# Altium PCB FDTI_USB_PCB.PcbDoc (part 1 of 2)
Units mil, origin at the board's own origin, x right, y up, seen from the top; angles counter-clockwise.
Board outline 5600 x 4000 mil, 4 copper layers (Top Layer, Plane(Gnd), Plane(PWR), Bottom Layer), stack 23.756 mil thick; 166 components, 158 nets, 411 pads, 530 vias.
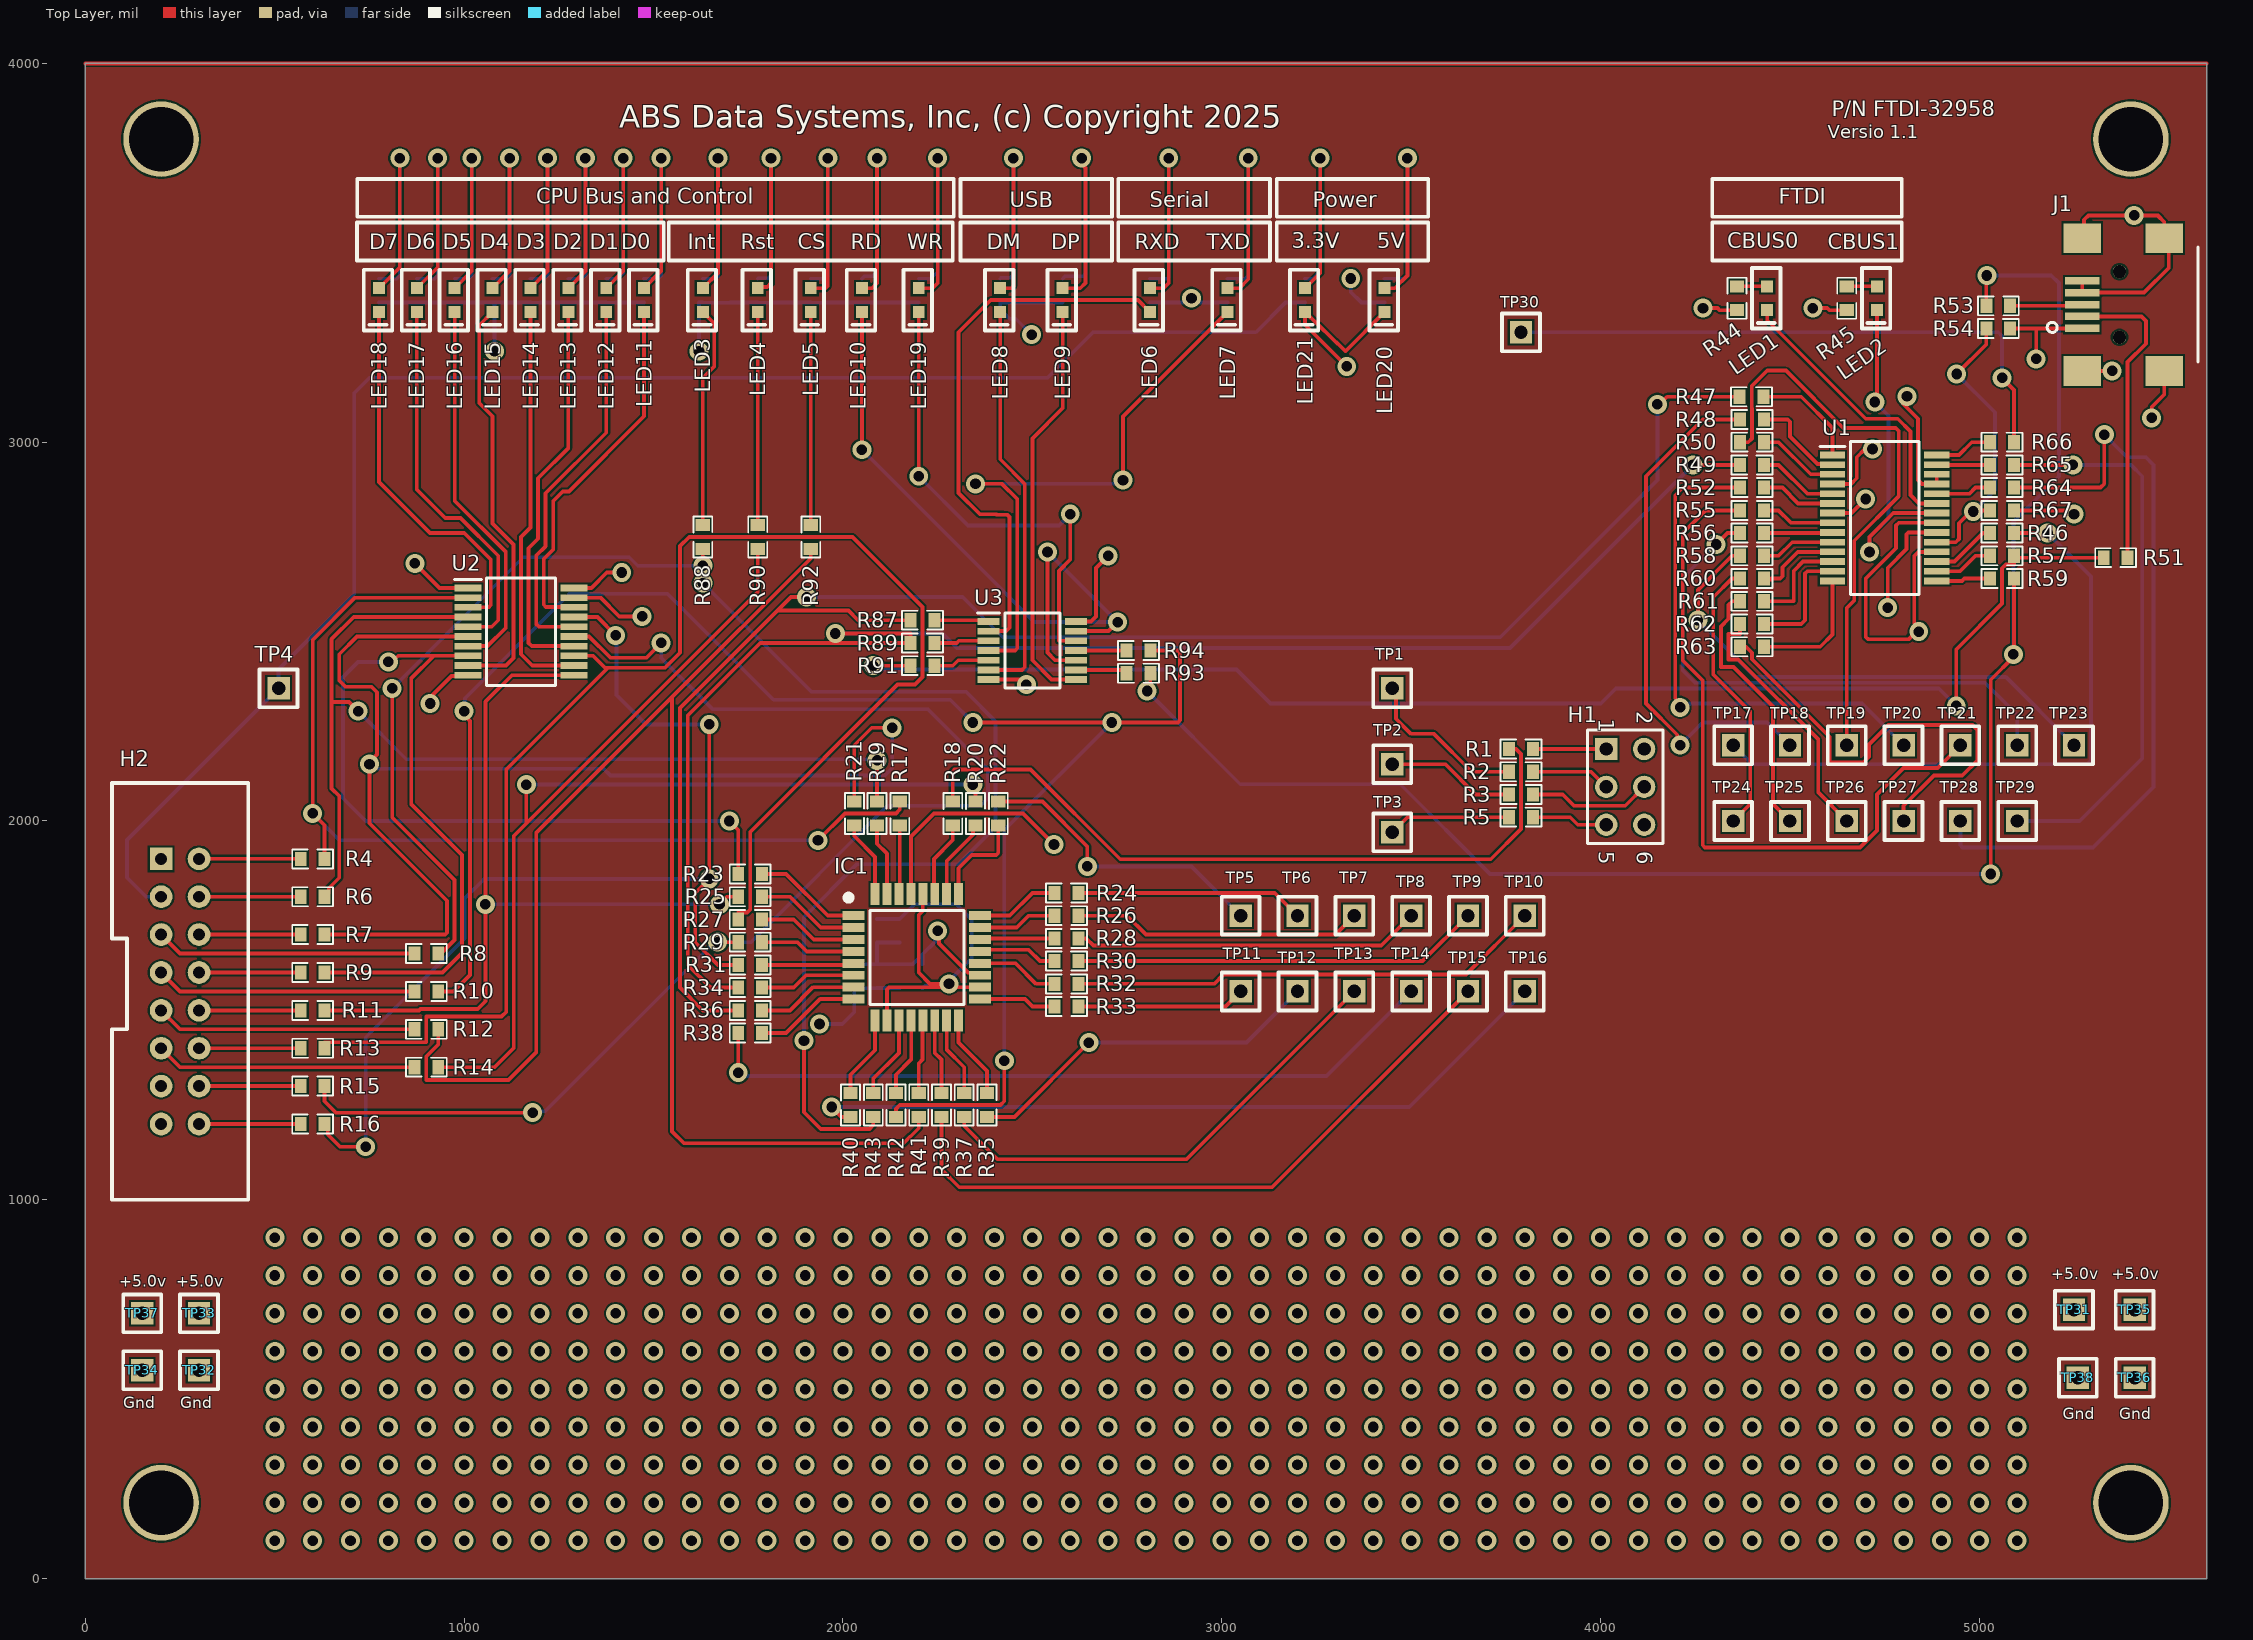
[diagram p0: Top Layer view]
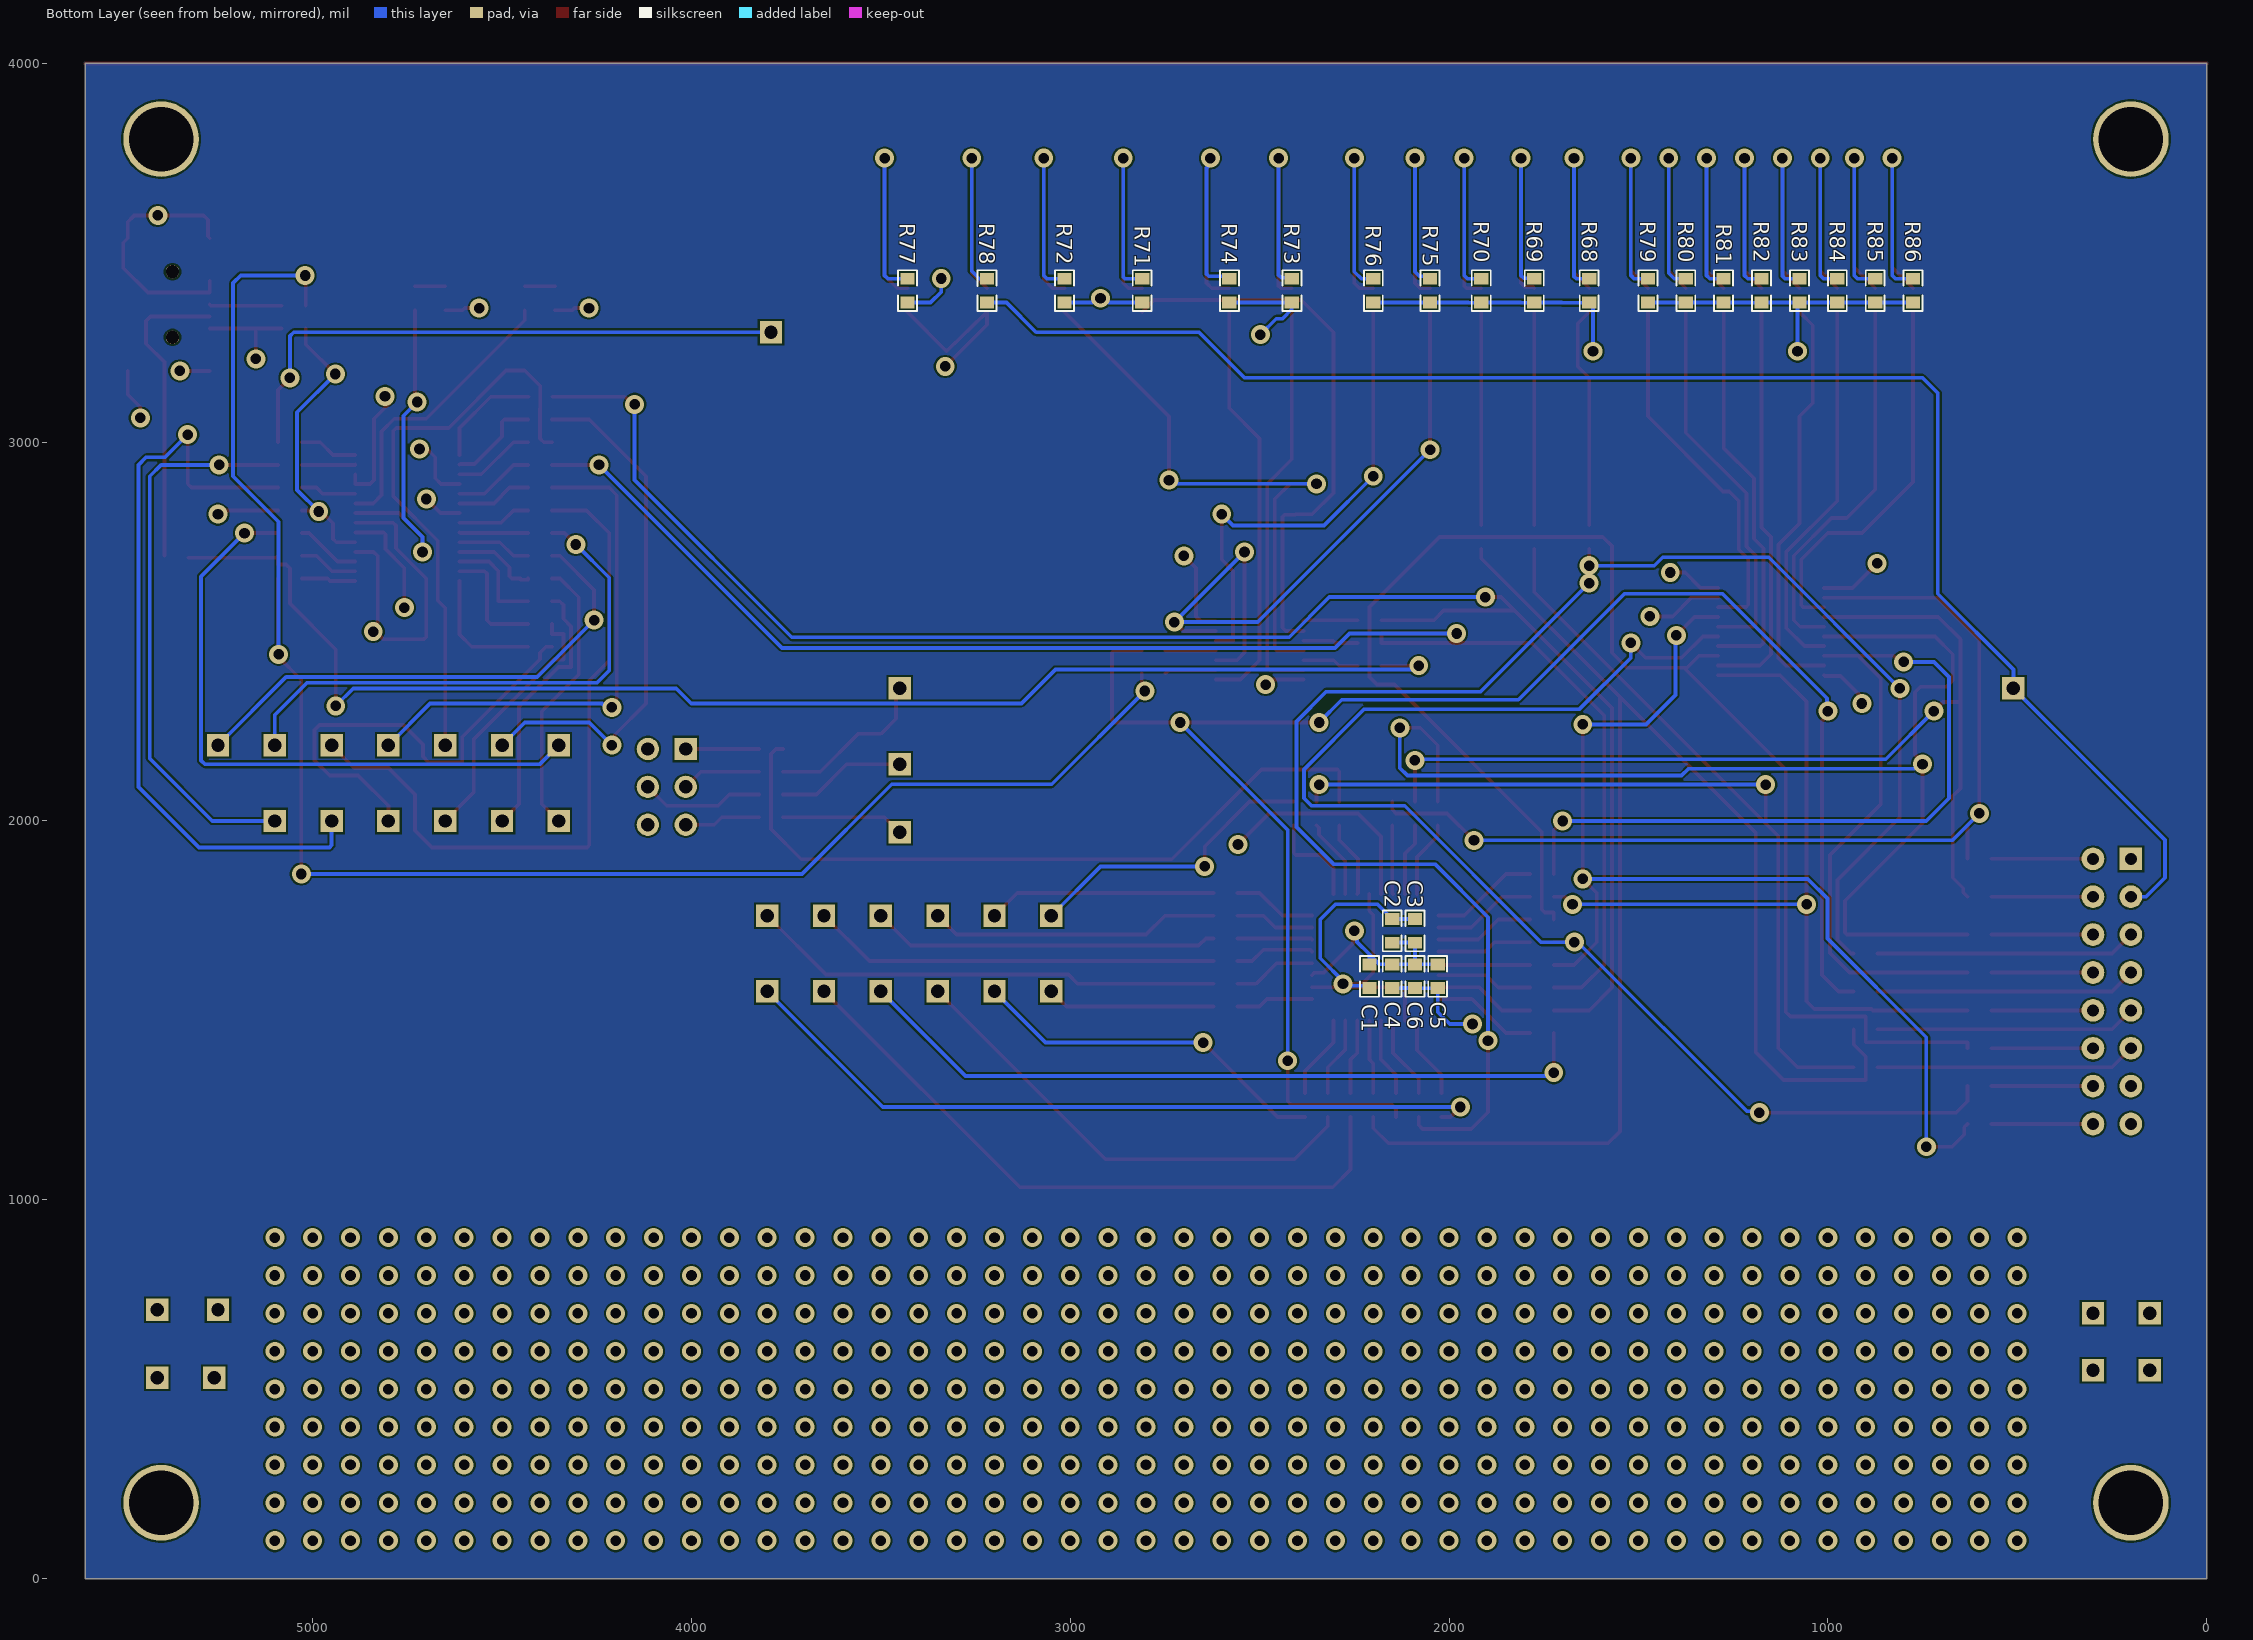
[diagram p1: Bottom Layer view, seen from below]
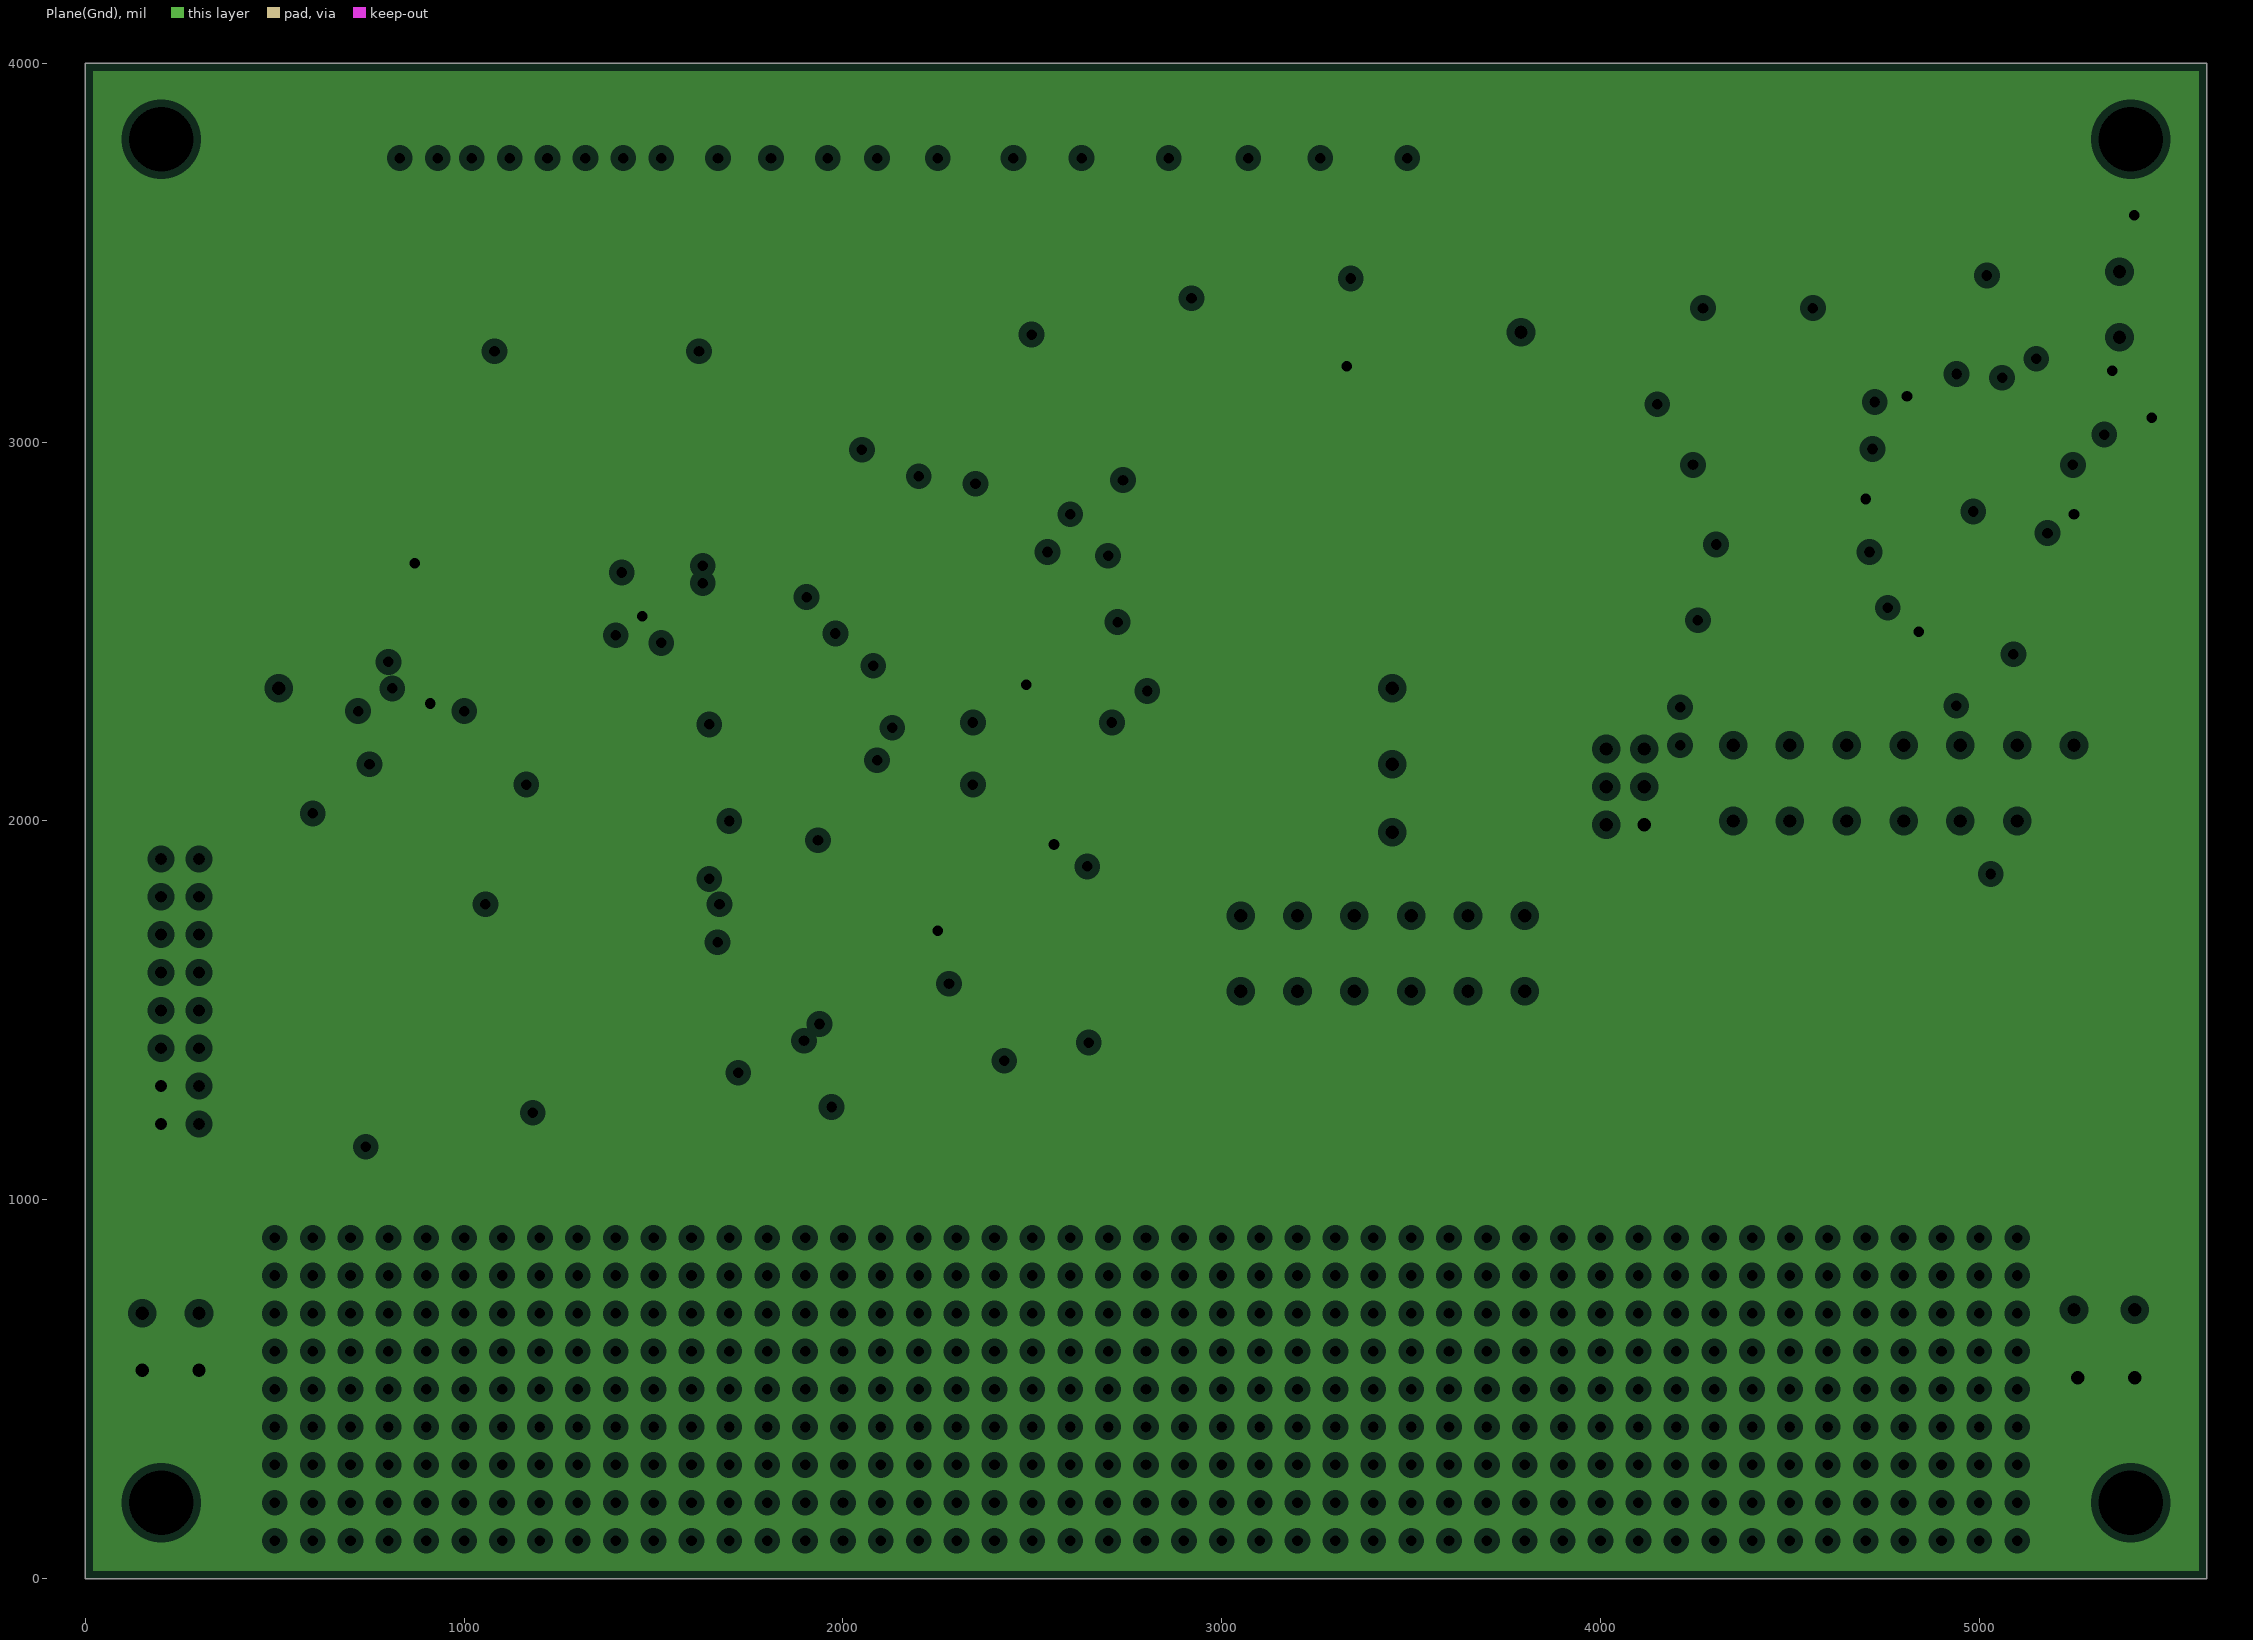
[diagram p2: Plane(Gnd), clearances drawn from the general rule]
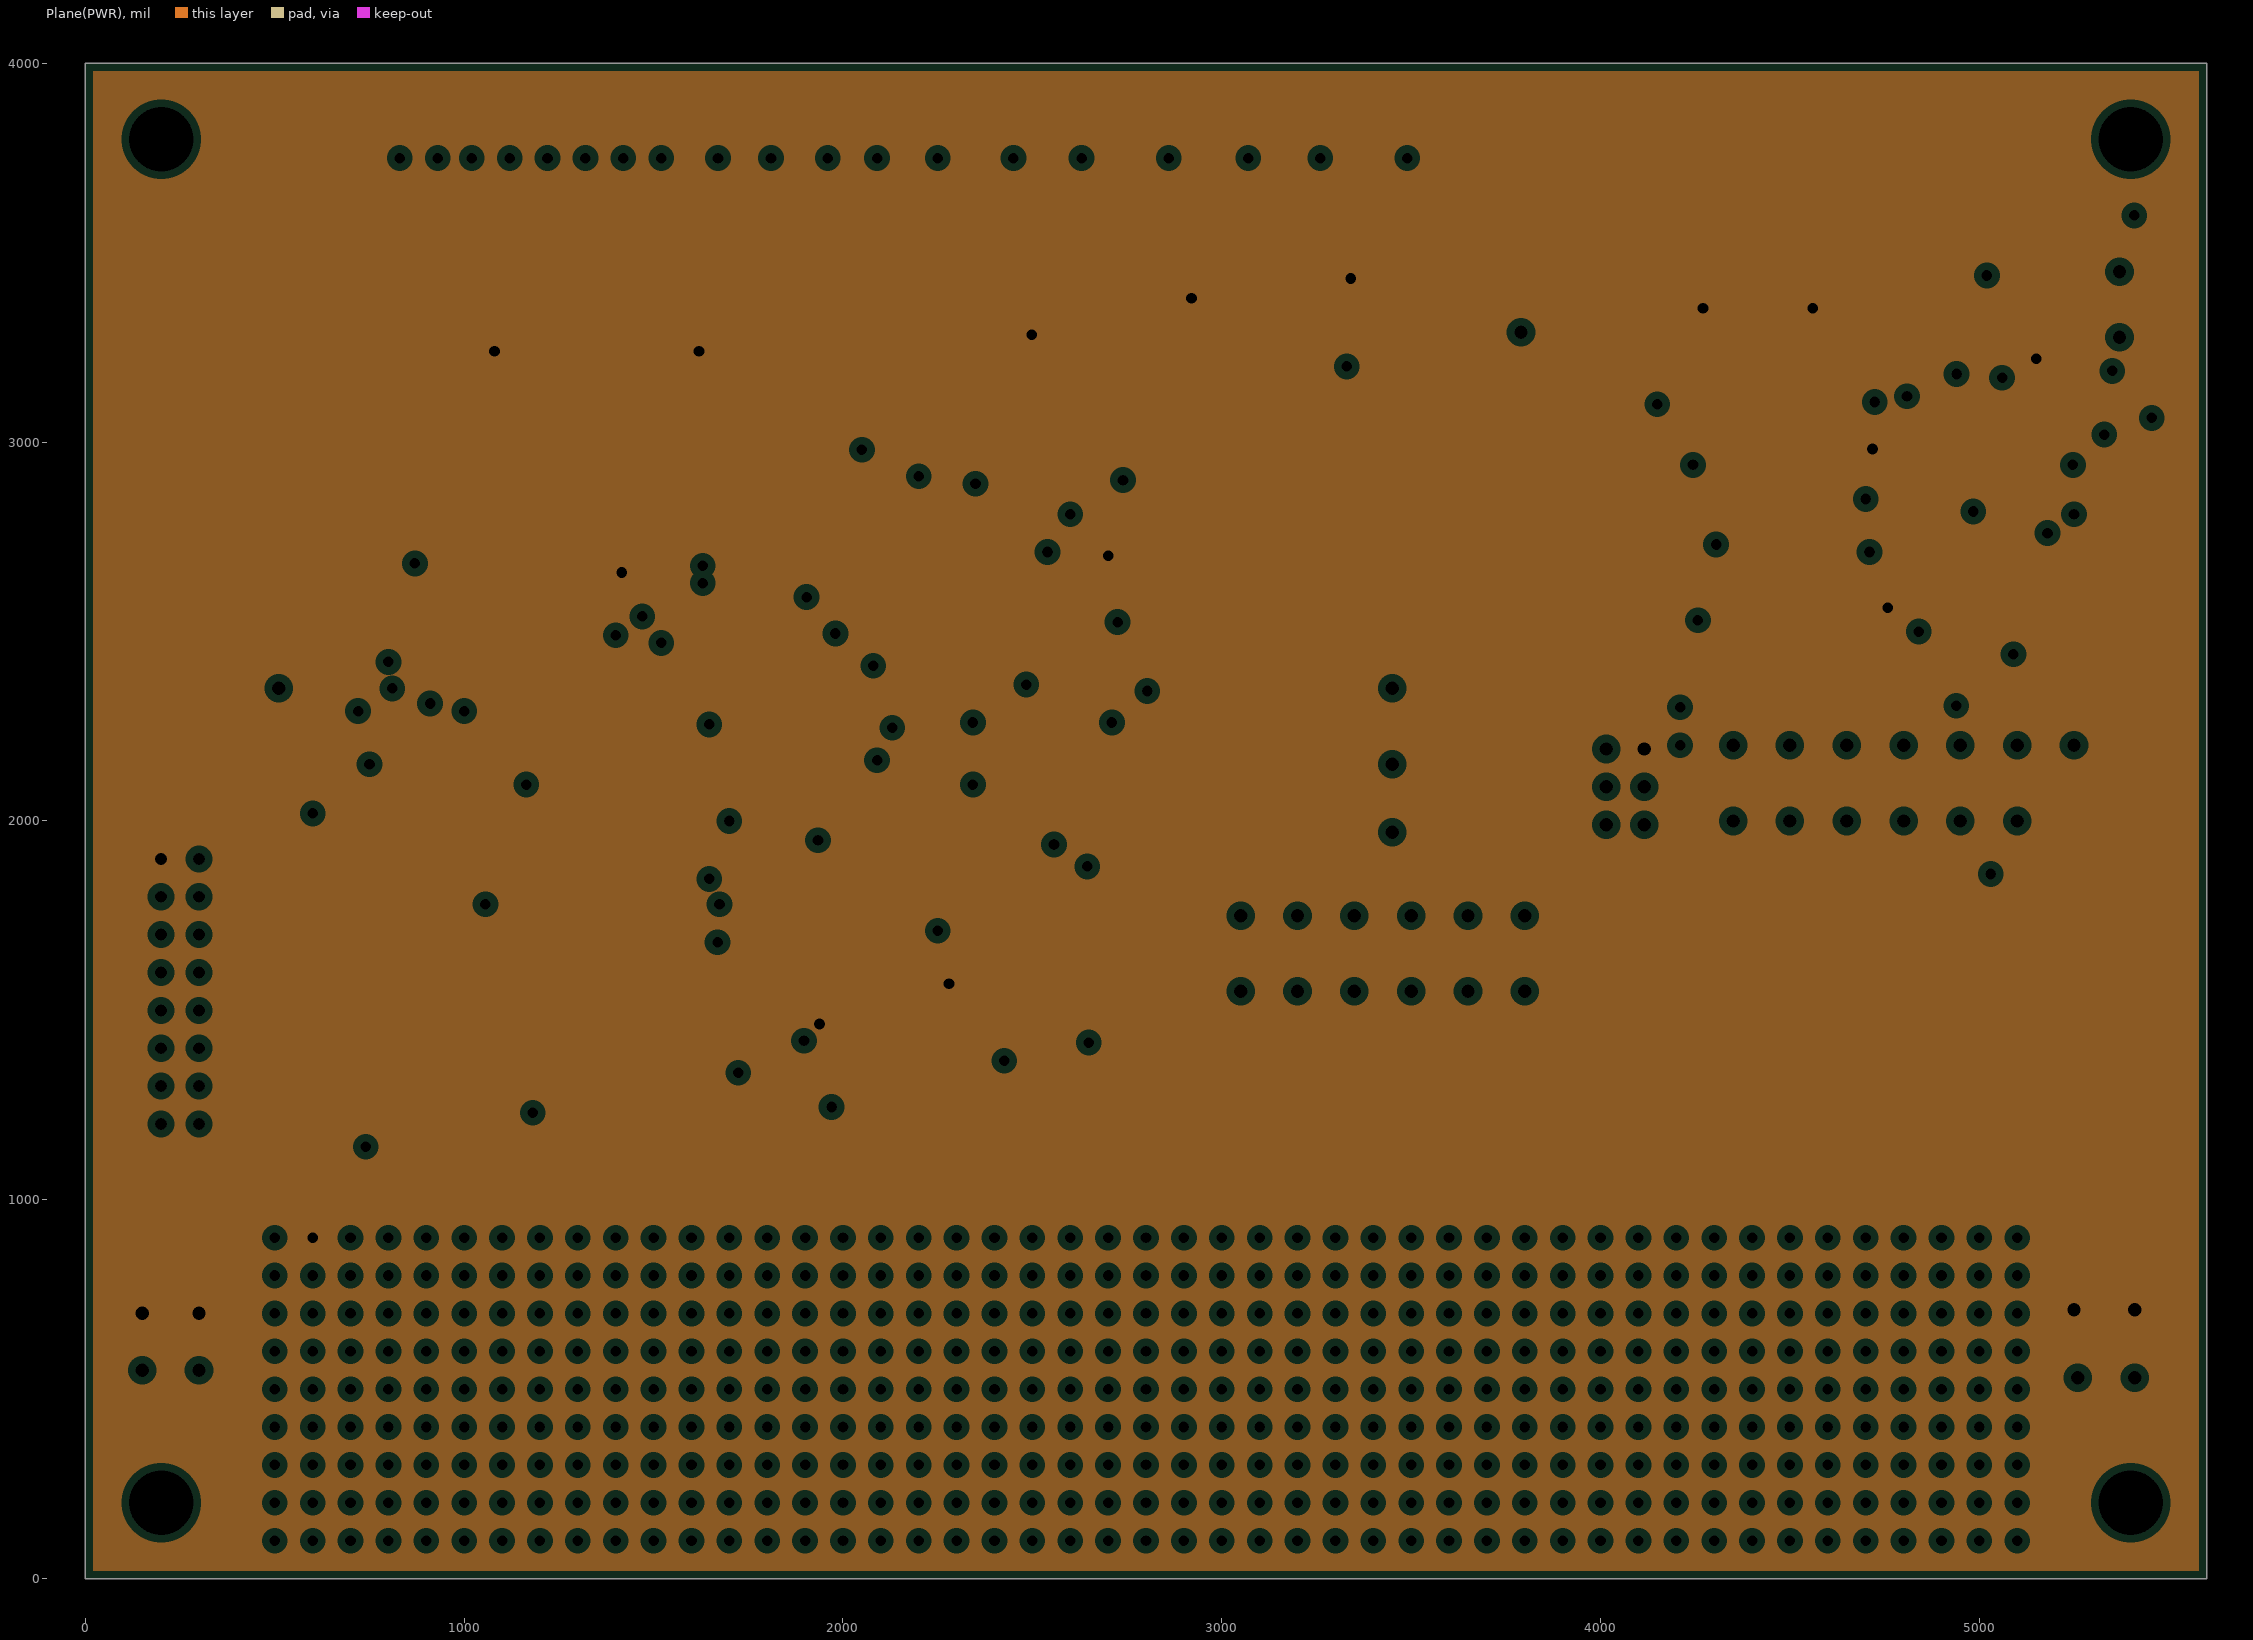
[diagram p3: Plane(PWR), clearances drawn from the general rule]
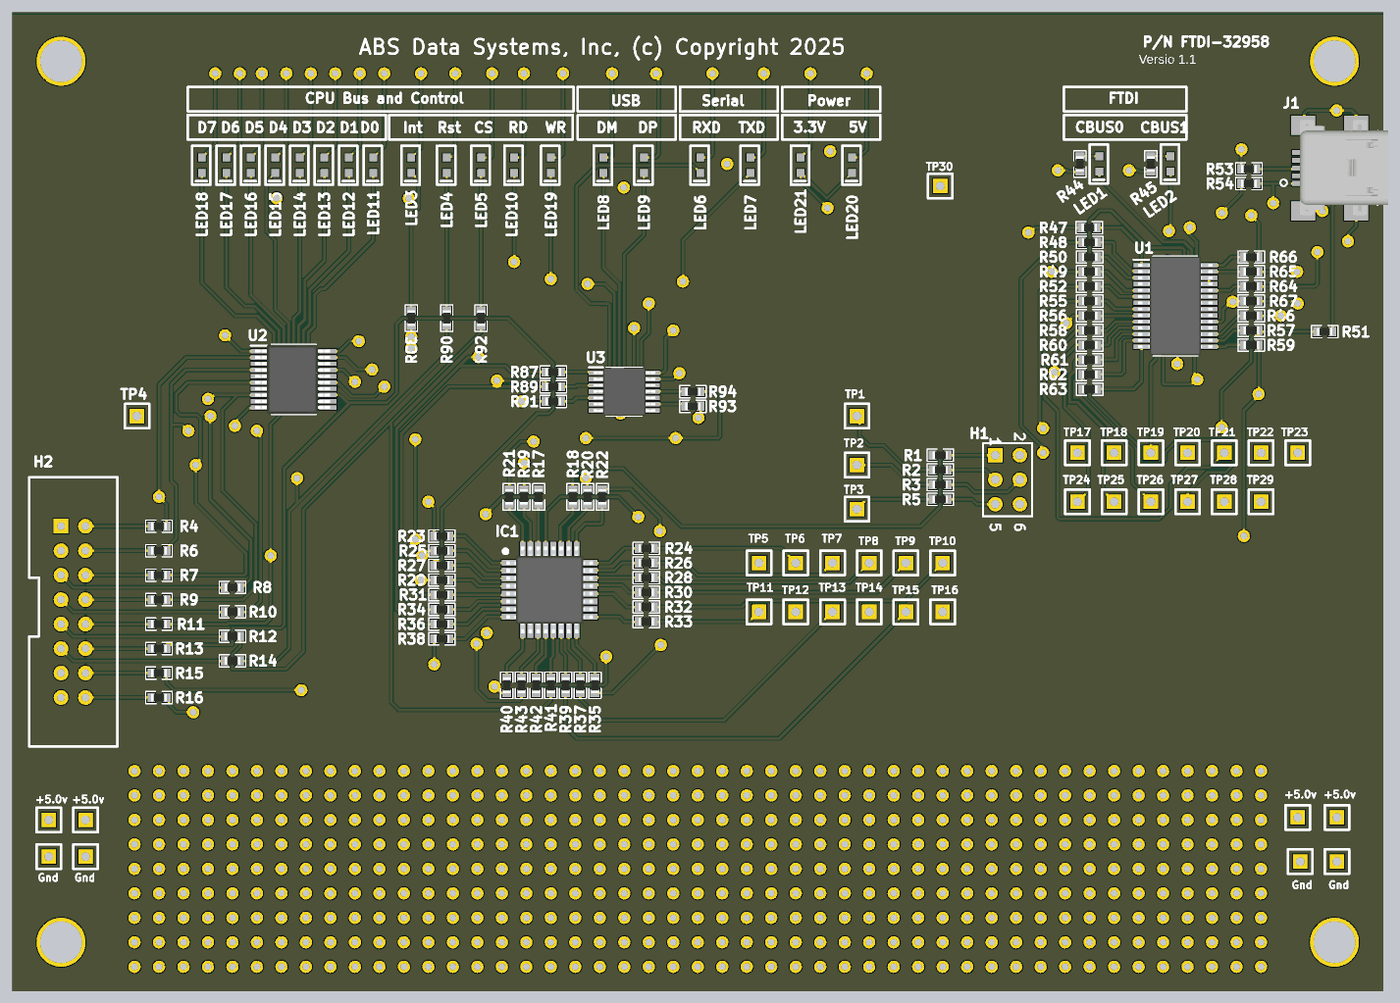
[diagram p5: 3D render of the assembled board from above, using the file's embedded part models]
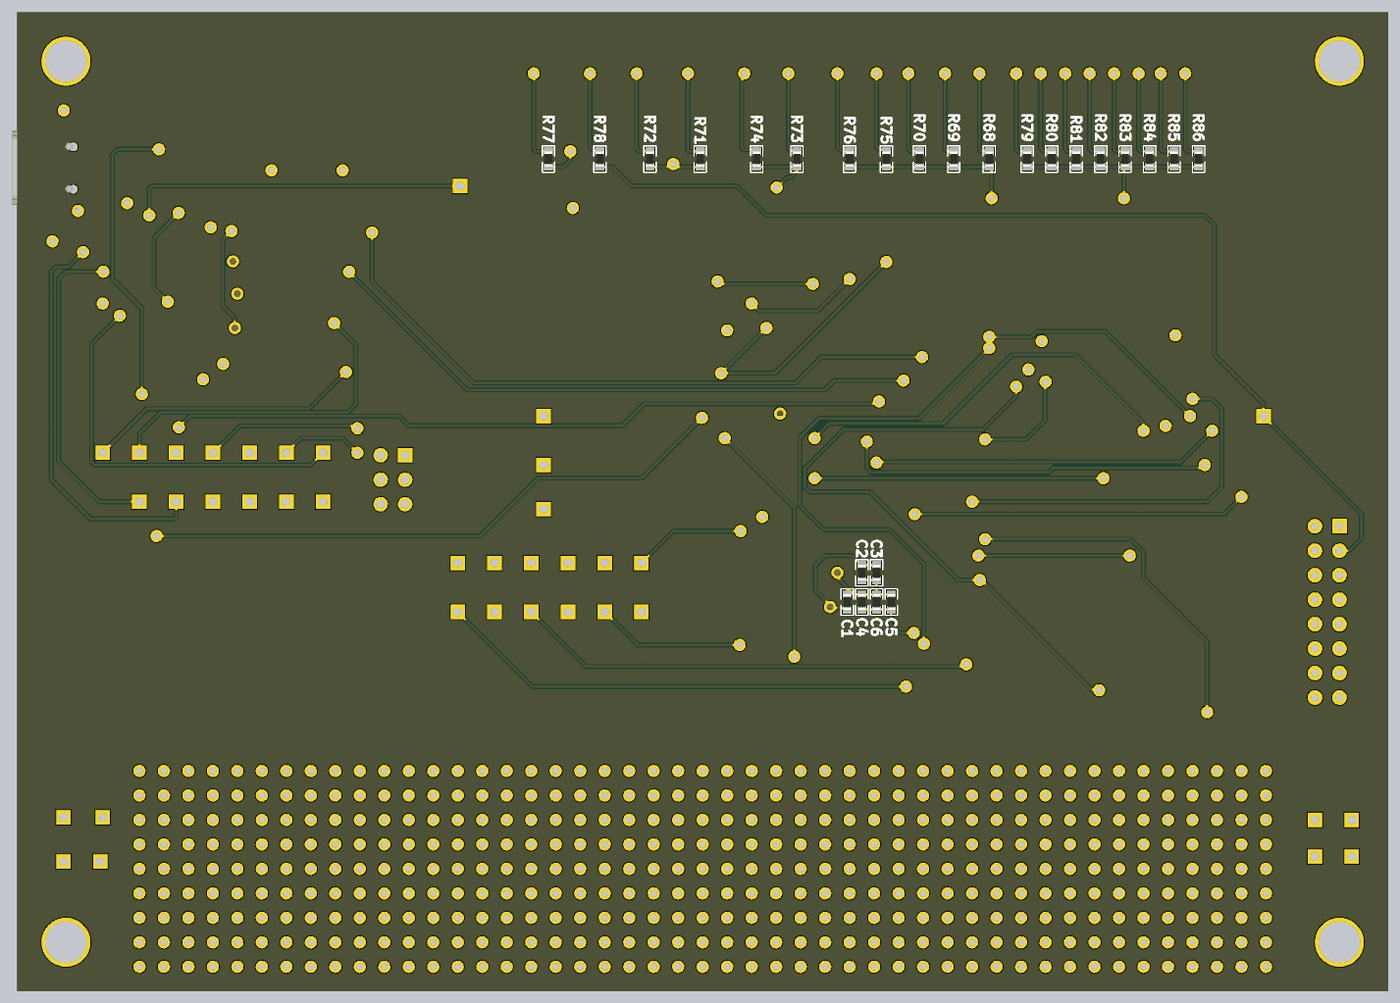
[diagram p6: 3D render of the assembled board from below, using the file's embedded part models]

## Layer stack, top to bottom
Top Solder: solder mask 0.4, Solder Resist, Dk 3.5
Top Layer: signal copper 1.4
Dielectric 2: prepreg 2.8, PP-006, Dk 4.1
Plane(Gnd): plane copper 1.378, net GND
Dielectric 1: dielectric 12.6, FR-4, Dk 4.8
Plane(PWR): plane copper 1.378, net +5
Dielectric 3: prepreg 2.8, PP-006, Dk 4.1
Bottom Layer: signal copper 1.4
Bottom Solder: solder mask 0.4, Solder Resist, Dk 3.5

## Board outline
0,0 0,4000 5600,4000 5600,0

## Design rules (kind name [scope] priority, off if disabled: settings)
Clearance [All] p1: gap=5 ignorepadtopadclearanceinfootprint=FALSE
HoleSize [All] p1: absolutevalues=TRUE maxlimit=200 minlimit=1 maxpercent=80.000 minpercent=20.000
HoleToHoleClearance [All] p1: gap=5 allowstackedmicrovias=TRUE
MinimumSolderMaskSliver [All] p1: minsoldermaskwidth=5
PlaneClearance [All] p1: clearance=20
PlaneConnect [All] p1: planeconnectstyle=Relief reliefexpansion=20 reliefentries=4 reliefconductorwidth=10 reliefairgap=10
PolygonConnect [All] p1: connectstyle=Relief reliefconductorwidth=10 reliefentries=4 polygonreliefangle="90 Angle" airgapwidth=10
RoutingVias [All] p1: holewidth=28 width=50 viastyle="Through Hole" minholewidth=28 minwidth=50 maxholewidth=28 maxwidth=50
SilkToSilkClearance [All] p1: silktosilkclearance=4
SilkToSolderMaskClearance [IsPad] p1: minsilkscreentomaskgap=3.5 clearancetoexposedcopper=TRUE
SolderMaskExpansion [All] p1: expansion=4 istentingtop=FALSE
Width [All] p1: maxlimit=10 minlimit=5 preferedwidth=10 minimp=50.000000 maximp=50.000000 favimp=50.000000
23 further rules are at their usual default settings.

## Classes and differential pairs
component class FDTI_USB_Card: C1 C2 C3 C4 C5 C6 H1 H2 IC1 J1 LED1 LED2 R1 R2 R3 R4 R5 R6 R7 R8 R9 R10 R11 R12 R13 R14 R15 R16 R17 R18 R19 R20 R21 R22 R23 R24 R25 R26 R27 R28 R29 R30 R31 R32 R33 R34 R35 R36 R37 R38 R39 R40 R41 R42 R43 R44 R45 R46 R47 R48 R49 R50 R51 R52 R53 R54 R55 R56 R57 R58 R59 R60 R61 R62 R63 R64 R65 R66 R67 TP1 TP2 TP3 TP4 TP5 TP6 TP7 TP8 TP9 TP10 TP11 TP12 TP13 TP14 TP15 TP16 TP17 TP18 TP19 TP20 TP21 TP22 TP23 TP24 TP25 TP26 TP27 TP28 TP29 TP30 TP31 TP32 TP33 TP34 TP35 TP36 TP37 TP38 U1
component class FDTI_LED_Monitor: LED3 LED4 LED5 LED6 LED7 LED8 LED9 LED10 LED11 LED12 LED13 LED14 LED15 LED16 LED17 LED18 LED19 LED20 LED21 R68 R69 R70 R71 R72 R73 R74 R75 R76 R77 R78 R79 R80 R81 R82 R83 R84 R85 R86 R87 R88 R89 R90 R91 R92 R93 R94 U2 U3

## Components (designator, comment, footprint, x,y, rotation, side; value= is the part's Value field where it differs from the comment)
C1 "100nf" 0603 2210,1590 r90 bottom locked
C2 "1uf" 0603 2150,1710 r270 bottom locked
C3 "100nf" 0603 2090,1710 r270 bottom locked
C4 "1uf" 0603 2150,1590 r90 bottom locked
C5 "100nf" 0603 2030,1590 r90 bottom locked
C6 "1uf" 0603 2090,1590 r90 bottom locked
H1 "UDPI Programmer" HDR2X3 4015,2190 r270 top locked
H2 "Header_IDC_2x8" HEADER16 200,1900 r0 top locked
IC1 "AVR64DD32-I_PT" QFP80P900X900X120-32N 2195,1640 r0 top locked
J1 "USB Micro Connector" 1734035-2USB 5370,3450 r180 top locked
LED1 "green" 0603_Diode 4440,3380 r90 top
LED2 "red" 0603_Diode 4730,3380 r90 top
LED3 "amber" 0603_Diode 1630,3375 r90 top
LED4 "blue" 0603_Diode 1775,3375 r90 top
LED5 "green" 0603_Diode 1915,3375 r90 top
LED6 "green" 0603_Diode 2810,3375 r90 top
LED7 "green" 0603_Diode 3015,3375 r90 top
LED8 "green" 0603_Diode 2415,3375 r90 top
LED9 "green" 0603_Diode 2580,3375 r90 top
LED10 "green" 0603_Diode 2050,3375 r90 top
LED11 "green" 0603_Diode 1475,3375 r90 top locked
LED12 "green" 0603_Diode 1375,3375 r90 top locked
LED13 "green" 0603_Diode 1275,3375 r90 top locked
LED14 "green" 0603_Diode 1175,3375 r90 top locked
LED15 "green" 0603_Diode 1075,3375 r90 top locked
LED16 "green" 0603_Diode 975,3375 r90 top locked
LED17 "green" 0603_Diode 875,3375 r90 top locked
LED18 "green" 0603_Diode 775,3375 r90 top locked
LED19 "red" 0603_Diode 2200,3375 r90 top
LED20 "red" 0603_Diode 3430,3375 r90 top
LED21 "amber" 0603_Diode 3220,3375 r90 top
R1 "0R" 0603 3790,2190 r0 top locked
R2 "0R" 0603 3790,2130 r0 top locked
R3 "0R" 0603 3790,2070 r180 top locked
R4 "0R" 0603 600,1900 r180 top locked
R5 "0R" 0603 3790,2010 r0 top locked
R6 "0R" 0603 600,1800 r180 top locked
R7 "0R" 0603 600,1700 r180 top locked
R8 "0R" 0603 900,1650 r0 top locked
R9 "0R" 0603 600,1600 r180 top locked
R10 "0R" 0603 900,1550 r0 top locked
R11 "0R" 0603 600,1500 r180 top locked
R12 "0R" 0603 900,1450 r0 top locked
R13 "0R" 0603 600,1400 r180 top locked
R14 "0R" 0603 900,1350 r0 top locked
R15 "0R" 0603 600,1300 r180 top locked
R16 "0R" 0603 600,1200 r180 top locked
R17 "0R" 0603 2150,2020 r270 top locked
R18 "0R" 0603 2290,2020 r90 top locked
R19 "0R" 0603 2090,2020 r270 top locked
R20 "0R" 0603 2350,2020 r90 top locked
R21 "0R" 0603 2030,2020 r270 top locked
R22 "0R" 0603 2410,2020 r90 top locked
R23 "0R" 0603 1755,1860 r0 top locked
R24 "0R" 0603 2590,1810 r0 top locked
R25 "0R" 0603 1755,1800 r0 top locked
R26 "0R" 0603 2590,1750 r0 top locked
R27 "0R" 0603 1755,1740 r0 top locked
R28 "0R" 0603 2590,1690 r0 top locked
R29 "0R" 0603 1755,1680 r0 top locked
R30 "0R" 0603 2590,1630 r0 top locked
R31 "0R" 0603 1755,1620 r0 top locked
R32 "0R" 0603 2590,1570 r0 top locked
R33 "0R" 0603 2590,1510 r0 top locked
R34 "0R" 0603 1755,1560 r0 top locked
R35 "0R" 0603 2380,1250 r270 top locked
R36 "0R" 0603 1755,1500 r0 top locked
R37 "0R" 0603 2320,1250 r270 top locked
R38 "0R" 0603 1755,1440 r0 top locked
R39 "0R" 0603 2260,1250 r270 top locked
R40 "0R" 0603 2020,1250 r90 top locked
R41 "0R" 0603 2200,1250 r270 top locked
R42 "0R" 0603 2140,1250 r270 top locked
R43 "0R" 0603 2080,1250 r270 top locked
R44 "270" 0603 4360,3380 r270 top
R45 "270" 0603 4650,3380 r270 top
R46 "0R" 0603 5060,2760 r0 top
R47 "0R" 0603 4398.5,3120 r0 top locked
R48 "0R" 0603 4400,3060 r180 top locked
R49 "0R" 0603 4400,2940 r0 top locked
R50 "0R" 0603 4400,3000 r180 top locked
R51 "0R" 0603 5360,2695 r180 top
R52 "0R" 0603 4400,2880 r180 top locked
R53 "0R" 0603 5050,3360 r180 top locked
R54 "4.7k" 0603 5050,3300 r0 top locked
R55 "0R" 0603 4400,2820 r180 top locked
R56 "0R" 0603 4400,2760 r180 top locked
R57 "0R" 0603 5060,2700 r180 top
R58 "0R" 0603 4400,2700 r180 top locked
R59 "0R" 0603 5060,2640 r180 top
R60 "0R" 0603 4400,2640 r180 top locked
R61 "0R" 0603 4400,2580 r180 top locked
R62 "0R" 0603 4400,2520 r180 top locked
R63 "0R" 0603 4400,2460 r180 top locked
R64 "0R" 0603 5060,2880 r0 top
R65 "0R" 0603 5060,2940 r0 top
R66 "0R" 0603 5060,3000 r0 top
R67 "10k" 0603 5060,2820 r180 top
R68 "180" 0603 1630,3400 r270 bottom
R69 "100" 0603 1775,3400 r90 bottom
R70 "180" 0603 1915,3400 r270 bottom
R71 "180" 0603 2810,3400 r270 bottom
R72 "180" 0603 3015,3400 r270 bottom
R73 "180" 0603 2415,3400 r270 bottom
R74 "180" 0603 2580,3400 r270 bottom
R75 "180" 0603 2050,3400 r270 bottom
R76 "180" 0603 2200,3400 r270 bottom
R77 "180" 0603 3430,3400 r270 bottom
R78 "47" 0603 3220,3400 r90 bottom
R79 "180" 0603 1475,3400 r270 bottom locked
R80 "180" 0603 1375,3400 r270 bottom locked
R81 "180" 0603 1275,3400 r270 bottom locked
R82 "180" 0603 1175,3400 r270 bottom locked
R83 "180" 0603 1075,3400 r270 bottom locked
R84 "180" 0603 975,3400 r270 bottom locked
R85 "180" 0603 875,3400 r270 bottom locked
R86 "180" 0603 775,3400 r270 bottom locked
R87 "0R" 0603 2210,2530 r0 top locked
R88 "0R" 0603 1630,2750 r90 top
R89 "0R" 0603 2210,2470 r0 top locked
R90 "0R" 0603 1775,2750 r90 top
R91 "0R" 0603 2210,2410 r0 top locked
R92 "0R" 0603 1915,2750 r90 top locked
R93 "0R" 0603 2780,2390 r180 top locked
R94 "0R" 0603 2780,2450 r180 top locked
TP1 "TP" TP 3450,2350 r0 top locked
TP2 "TP" TP 3450,2150 r0 top locked
TP3 "TP" TP 3450,1970 r0 top locked
TP4 "TP" TP 510,2350 r0 top
TP5 "TP" TP 3050,1750 r0 top locked
TP6 "TP" TP 3200,1750 r0 top locked
TP7 "TP" TP 3350,1750 r0 top locked
TP8 "TP" TP 3500,1750 r0 top locked
TP9 "TP" TP 3650,1750 r0 top locked
TP10 "TP" TP 3800,1750 r0 top locked
TP11 "TP" TP 3050,1550 r0 top locked
TP12 "TP" TP 3200,1550 r0 top locked
TP13 "TP" TP 3350,1550 r0 top locked
TP14 "TP" TP 3500,1550 r0 top locked
TP15 "TP" TP 3650,1550 r0 top locked
TP16 "TP" TP 3800,1550 r0 top locked
TP17 "TP" TP 4350,2200 r0 top locked
TP18 "TP" TP 4500,2200 r0 top locked
TP19 "TP" TP 4650,2200 r0 top locked
TP20 "TP" TP 4800,2200 r0 top locked
TP21 "TP" TP 4950,2200 r0 top locked
TP22 "TP" TP 5100,2200 r0 top locked
TP23 "TP" TP 5250,2200 r0 top locked
TP24 "TP" TP 4350,2000 r0 top locked
TP25 "TP" TP 4500,2000 r0 top locked
TP26 "TP" TP 4650,2000 r0 top locked
TP27 "TP" TP 4800,2000 r0 top locked
TP28 "TP" TP 4950,2000 r0 top locked
TP29 "TP" TP 5100,2000 r0 top locked
TP30 "TP" TP 3790,3290 r0 top
TP31 "TP" TP 5250,710 r0 top
TP32 "TP" TP 300,550 r0 top
TP33 "TP" TP 300,700 r0 top
TP34 "TP" TP 150,550 r0 top
TP35 "TP" TP 5410,710 r0 top
TP36 "TP" TP 5410,530 r0 top
TP37 "TP" TP 150,700 r0 top
TP38 "TP" TP 5260,530 r0 top
U1 "FT232RL-REEL" SOIC-28_Narrow 4750,2800 r0 top locked
U2 "SN74ABT240ADBR" SOP65P780X200-20N 1150,2500 r0 top locked
U3 "SN74AC04PWR" SOP65P640X120-14N 2500,2450 r0 top locked

## Footprints (in the part's own frame and the unit in brackets; to place one, negate y for a bottom-side part, rotate by r counter-clockwise, add the part's x,y. Pads: shape width x height; smd on the part's side, far side on the other; paste and mask are expansions set on the pad)
0603 [mm]
  rect 0.8x0.95 smd: 1(-0.8,0) 2(0.8,0)
  silkscreen extent -1.37,-0.64 1.37,0.64, body extent -0.8,-0.4 0.8,0.4, height 0.55
0603_Diode [mm]
  rect 0.8x0.8 smd: 1(-0.8,0) 2(0.8,0)
  silkscreen extent -2.03,-0.89 2.03,1.02
1734035-2USB [mm]
  rect 2.3x0.5 smd: 1(2.5,3.8) 2(2.5,3) 3(2.5,2.2) 4(2.5,1.4) 5(2.5,0.6)
  rect 2.5x2 smd: 6(2.5,-2.25) 7(-3,-2.25) 8(-3,6.65) 9(2.5,6.65)
  round 0.9 hole 0.9 unplated: 10(0,4.4) 11(0,0)
  silkscreen extent -5.25,-1.65 4.85,6.05, body extent -6.35,-2.79 2.85,7.11, height 4.17
HDR2X3 [mm] "Connector; Header; 3x2 Position"
  rect 1.5x1.5 hole 0.9: 1(0,0)
  round 1.5 hole 0.9: 2(0,2.54) 3(2.54,0) 4(2.54,2.54) 5(5.08,0) 6(5.08,2.54)
  silkscreen extent -1.27,-1.27 6.35,3.81
HEADER16 [mil]
  rect 60x60 hole 31.5: 1(0,0)
  round 60 hole 31.5: 2(100,0) 3(0,-100) 4(100,-100) 5(0,-200) 6(100,-200) 7(0,-300) 8(100,-300) 9(0,-400) 10(100,-400) 11(0,-500) 12(100,-500) 13(0,-600) 14(100,-600) 15(0,-700) 16(100,-700)
  silkscreen extent -130,-900 230,200
QFP80P900X900X120-32N [mm]
  rect 1.475x0.6 smd: 1(-4.238,2.8) 2(-4.238,2) 3(-4.238,1.2) 4(-4.238,0.4) 5(-4.238,-0.4) 6(-4.238,-1.2) 7(-4.238,-2) 8(-4.238,-2.8) 17(4.238,-2.8) 18(4.238,-2) 19(4.238,-1.2) 20(4.238,-0.4) 21(4.238,0.4) 22(4.238,1.2) 23(4.238,2) 24(4.238,2.8)
  rect 0.6x1.475 smd: 9(-2.8,-4.238) 10(-2,-4.238) 11(-1.2,-4.238) 12(-0.4,-4.238) 13(0.4,-4.238) 14(1.2,-4.238) 15(2,-4.238) 16(2.8,-4.238) 25(2.8,4.238) 26(2,4.238) 27(1.2,4.238) 28(0.4,4.238) 29(-0.4,4.238) 30(-1.2,4.238) 31(-2,4.238) 32(-2.8,4.238)
  silkscreen extent -4.77,-3.15 3.15,4.2, body extent -4.5,-4.5 4.5,4.5, height 1.2
SOIC-28_Narrow [mm]
  rect 1.7x0.45 smd: 1(-3.5,4.225) 2(-3.5,3.575) 3(-3.5,2.925) 4(-3.5,2.275) 5(-3.5,1.625) 6(-3.5,0.975) 7(-3.5,0.325) 8(-3.5,-0.325) 9(-3.5,-0.975) 10(-3.5,-1.625) 11(-3.5,-2.275) 12(-3.5,-2.925) 13(-3.5,-3.575) 14(-3.5,-4.225) 15(3.5,-4.225) 16(3.5,-3.575) 17(3.5,-2.925) 18(3.5,-2.275) 19(3.5,-1.625) 20(3.5,-0.975) 21(3.5,-0.325) 22(3.5,0.325) 23(3.5,0.975) 24(3.5,1.625) 25(3.5,2.275) 26(3.5,2.925) 27(3.5,3.575) 28(3.5,4.225)
  silkscreen extent -4.35,-5.14 2.3,5.14, body extent -3.89,-5.14 3.89,5.14, height 2
SOP65P640X120-14N [mm]
  rect 1.475x0.45 smd: 1(-2.938,1.95) 2(-2.938,1.3) 3(-2.938,0.65) 4(-2.938,0) 5(-2.938,-0.65) 6(-2.938,-1.3) 7(-2.938,-1.95) 8(2.938,-1.95) 9(2.938,-1.3) 10(2.938,-0.65) 11(2.938,0) 12(2.938,0.65) 13(2.938,1.3) 14(2.938,1.95)
  silkscreen extent -3.67,-2.5 1.85,2.53, body extent -3.2,-2.5 3.2,2.5, height 1.13
SOP65P780X200-20N [mm]
  rect 1.8x0.45 smd: 1(-3.55,2.925) 2(-3.55,2.275) 3(-3.55,1.625) 4(-3.55,0.975) 5(-3.55,0.325) 6(-3.55,-0.325) 7(-3.55,-0.975) 8(-3.55,-1.625) 9(-3.55,-2.275) 10(-3.55,-2.925) 11(3.55,-2.925) 12(3.55,-2.275) 13(3.55,-1.625) 14(3.55,-0.975) 15(3.55,-0.325) 16(3.55,0.325) 17(3.55,0.975) 18(3.55,1.625) 19(3.55,2.275) 20(3.55,2.925)
  silkscreen extent -4.45,-3.6 2.3,3.6, body extent -4.03,-3.6 3.77,3.6, height 1.9
TP [mm] "Test Point"
  rect 1.5x1.5 hole 0.9: 1(0,0)
  silkscreen extent -1.27,-1.27 1.27,1.27

## Part data
C1 C3 C5: library part CL10B104JB8NNNC, "Samsung Electro-Mechanics 0603 100nf"
C2 C4 C6: library part CL10B105KA8NNNL, "Samsung Electro-Mechanics 0603 1uf"
H1: "6 Pin 2X3 Through Hole Header"
H2: "16 Pin 2x8 Through Hold IDC Connector", Color=Black, Manufacturer=Samtec, Manufacturer Part Number=TST-108-01-G-D, Max Operating Temperature=125°C, Min Operating Temperature=-55°C, Supplier Part Number 1=SAM10835-ND, Category="Headers and Wire Housings", ComponentLink1Description=https://datasheet.ciiva.com/739/tst-mkt-739845.pdf?src-supplier=Digi-Key, ComponentLink1URL=https://datasheet.ciiva.com/739/tst-mkt-739845.pdf?src-supplier=Digi-Key, ComponentLink2Description=https://datasheet.ciiva.com/10018/htst-10018510.pdf?src-supplier=Avnet, ComponentLink2URL=https://datasheet.ciiva.com/10018/htst-10018510.pdf?src-supplier=Avnet, Connector Type="Male Pin", Contact Material=Bronze, Contact Mating Length=0.25inch, Contact Plating=Gold, Depth=9.27mm, Gender=Male, Housing Color=Black, Housing Material=Polyester, Length=27.94mm, Mount="Through Hole", Number of Contacts=16, Number of Positions=16, Number of Rows=2, Orientation=Straight, Packaging=Rail/Tube, Pitch=2.54mm, Pricing 1="1=2.85000, 10=2.73600, 100=2.28000, 500=1.93800, 1000=1.65300, 5000=1.48200 (USD)", REACH SVHC="No SVHC", RoHS=Yes, Row Spacing=0.1inch, Stock 1=227, Supplier 1=Digi-Key, Termination=Solder
IC1: "Integrated Circuit", Manufacturer_Name=Microchip, Manufacturer_Part_Number="AVR64DD32-I/PT | MULTI-VOLTAGE I/O", Datasheet Link=https://www.microchip.com/en-us/product/AVR64DD32, Height=1.2mm
J1: library part 1734035-4, "USB Micro Connector SMD", Manufacturer_Name="TE Connectivity", Mouser2 Part Number=571-1734035-4, Datasheet Link=https://componentsearchengine.com//1734035-4.pdf, Manufacturer_Part_Number=1734035-4, Mouser2 Price/Stock=https://www.mouser.com/Search/Refine.aspx?Keyword=571-1734035-4
LED1 LED5 LED6 LED7 LED8 LED9 LED10 LED11 LED12 LED13 LED14 LED15 LED16 LED17 LED18: library part 150060GS75000, "Wurth Elektronik 0603 green", Case Code (Imperial)=0603, Case Code (Metric)=1608, Color=Green, Forward Current=30mA, Forward Voltage=3.2V, Manufacturer="Wurth Electronics", Max Operating Temperature=85°C, Min Operating Temperature=-40°C, Package Quantity=4000, Test Current=20mA, Case/Package=0603, Category=LEDs, ComponentLink1Description=https://datasheet.ciiva.com/29562/150060gs75000-29562868.pdf?src-supplier=Digi-Key, ComponentLink1URL=https://datasheet.ciiva.com/29562/150060gs75000-29562868.pdf?src-supplier=Digi-Key, ComponentLink2Description=https://datasheet.ciiva.com/29279/759427-da-01-en-chipled-0603-w-kl-gruen-150060gs75000-29279201.pdf?src-supplier=Conrad, ComponentLink2URL=https://datasheet.ciiva.com/29279/759427-da-01-en-chipled-0603-w-kl-gruen-150060gs75000-29279201.pdf?src-supplier=Conrad, ComponentLink3Description=https://datasheet.ciiva.com/29562/150060gs75000-29562869.pdf?src-supplier=Digi-Key, ComponentLink3URL=https://datasheet.ciiva.com/29562/150060gs75000-29562869.pdf?src-supplier=Digi-Key, ComponentLink4Description=https://datasheet.ciiva.com/29562/150060gs75000-29562870.pdf?src-supplier=Digi-Key, ComponentLink4URL=https://datasheet.ciiva.com/29562/150060gs75000-29562870.pdf?src-supplier=Digi-Key, Dominant Wavelength=520nm, Height=0.7mm, Lead Free="Lead Free", Length=1.6mm, Lens Style=Clear,Rectangular, Luminous Intensity=430mcd, Manufacturer Part Number=150060GS75000, Mount="Surface Mount", Packaging="Tape and Reel", Pricing 1="1=0.14000, 50=0.13300, 100=0.11400, 500=0.09900 (USD)", REACH SVHC=Unknown, RoHS=Yes, Stock 1=71509, Supplier 1=Digi-Key, Viewing Angle=140°, Wavelength=520nm, Width=0.8mm
LED2 LED19 LED20: library part 150060RS75000, "Wurth Elektronik 0603 red", Case Code (Imperial)=0603, Case Code (Metric)=1608, Color=Green, Forward Current=30mA, Forward Voltage=3.2V, Manufacturer="Wurth Electronics", Manufacturer Part Number=150060GS75000, Max Operating Temperature=85°C, Min Operating Temperature=-40°C, Package Quantity=4000, Test Current=20mA, Case/Package=0603, Category=LEDs, ComponentLink1Description=https://datasheet.ciiva.com/29562/150060gs75000-29562868.pdf?src-supplier=Digi-Key, ComponentLink1URL=https://datasheet.ciiva.com/29562/150060gs75000-29562868.pdf?src-supplier=Digi-Key, ComponentLink2Description=https://datasheet.ciiva.com/29279/759427-da-01-en-chipled-0603-w-kl-gruen-150060gs75000-29279201.pdf?src-supplier=Conrad, ComponentLink2URL=https://datasheet.ciiva.com/29279/759427-da-01-en-chipled-0603-w-kl-gruen-150060gs75000-29279201.pdf?src-supplier=Conrad, ComponentLink3Description=https://datasheet.ciiva.com/29562/150060gs75000-29562869.pdf?src-supplier=Digi-Key, ComponentLink3URL=https://datasheet.ciiva.com/29562/150060gs75000-29562869.pdf?src-supplier=Digi-Key, ComponentLink4Description=https://datasheet.ciiva.com/29562/150060gs75000-29562870.pdf?src-supplier=Digi-Key, ComponentLink4URL=https://datasheet.ciiva.com/29562/150060gs75000-29562870.pdf?src-supplier=Digi-Key, Dominant Wavelength=520nm, Height=0.7mm, Lead Free="Lead Free", Length=1.6mm, Lens Style=Clear,Rectangular, Luminous Intensity=430mcd, Mount="Surface Mount", Packaging="Tape and Reel", Pricing 1="1=0.14000, 50=0.13300, 100=0.11400, 500=0.09900 (USD)", REACH SVHC=Unknown, RoHS=Yes, Stock 1=71509, Supplier 1=Digi-Key, Viewing Angle=140°, Wavelength=520nm, Width=0.8mm
LED3 LED21: library part 150060AS75000, "Wurth Elektronik 0603 amber", Case Code (Imperial)=0603, Case Code (Metric)=1608, Color=Green, Forward Current=30mA, Forward Voltage=3.2V, Manufacturer="Wurth Electronics", Manufacturer Part Number=150060GS75000, Max Operating Temperature=85°C, Min Operating Temperature=-40°C, Package Quantity=4000, Test Current=20mA, Case/Package=0603, Category=LEDs, ComponentLink1Description=https://datasheet.ciiva.com/29562/150060gs75000-29562868.pdf?src-supplier=Digi-Key, ComponentLink1URL=https://datasheet.ciiva.com/29562/150060gs75000-29562868.pdf?src-supplier=Digi-Key, ComponentLink2Description=https://datasheet.ciiva.com/29279/759427-da-01-en-chipled-0603-w-kl-gruen-150060gs75000-29279201.pdf?src-supplier=Conrad, ComponentLink2URL=https://datasheet.ciiva.com/29279/759427-da-01-en-chipled-0603-w-kl-gruen-150060gs75000-29279201.pdf?src-supplier=Conrad, ComponentLink3Description=https://datasheet.ciiva.com/29562/150060gs75000-29562869.pdf?src-supplier=Digi-Key, ComponentLink3URL=https://datasheet.ciiva.com/29562/150060gs75000-29562869.pdf?src-supplier=Digi-Key, ComponentLink4Description=https://datasheet.ciiva.com/29562/150060gs75000-29562870.pdf?src-supplier=Digi-Key, ComponentLink4URL=https://datasheet.ciiva.com/29562/150060gs75000-29562870.pdf?src-supplier=Digi-Key, Dominant Wavelength=520nm, Height=0.7mm, Lead Free="Lead Free", Length=1.6mm, Lens Style=Clear,Rectangular, Luminous Intensity=430mcd, Mount="Surface Mount", Packaging="Tape and Reel", Pricing 1="1=0.14000, 50=0.13300, 100=0.11400, 500=0.09900 (USD)", REACH SVHC=Unknown, RoHS=Yes, Stock 1=71509, Supplier 1=Digi-Key, Viewing Angle=140°, Wavelength=520nm, Width=0.8mm
LED4: library part 150060BS75000, "Wurth Elektronik 0603 blue", Case Code (Imperial)=0603, Case Code (Metric)=1608, Color=Green, Forward Current=30mA, Forward Voltage=3.2V, Manufacturer="Wurth Electronics", Manufacturer Part Number=150060GS75000, Max Operating Temperature=85°C, Min Operating Temperature=-40°C, Package Quantity=4000, Test Current=20mA, Case/Package=0603, Category=LEDs, ComponentLink1Description=https://datasheet.ciiva.com/29562/150060gs75000-29562868.pdf?src-supplier=Digi-Key, ComponentLink1URL=https://datasheet.ciiva.com/29562/150060gs75000-29562868.pdf?src-supplier=Digi-Key, ComponentLink2Description=https://datasheet.ciiva.com/29279/759427-da-01-en-chipled-0603-w-kl-gruen-150060gs75000-29279201.pdf?src-supplier=Conrad, ComponentLink2URL=https://datasheet.ciiva.com/29279/759427-da-01-en-chipled-0603-w-kl-gruen-150060gs75000-29279201.pdf?src-supplier=Conrad, ComponentLink3Description=https://datasheet.ciiva.com/29562/150060gs75000-29562869.pdf?src-supplier=Digi-Key, ComponentLink3URL=https://datasheet.ciiva.com/29562/150060gs75000-29562869.pdf?src-supplier=Digi-Key, ComponentLink4Description=https://datasheet.ciiva.com/29562/150060gs75000-29562870.pdf?src-supplier=Digi-Key, ComponentLink4URL=https://datasheet.ciiva.com/29562/150060gs75000-29562870.pdf?src-supplier=Digi-Key, Dominant Wavelength=520nm, Height=0.7mm, Lead Free="Lead Free", Length=1.6mm, Lens Style=Clear,Rectangular, Luminous Intensity=430mcd, Mount="Surface Mount", Packaging="Tape and Reel", Pricing 1="1=0.14000, 50=0.13300, 100=0.11400, 500=0.09900 (USD)", REACH SVHC=Unknown, RoHS=Yes, Stock 1=71509, Supplier 1=Digi-Key, Viewing Angle=140°, Wavelength=520nm, Width=0.8mm
R1 R2 R3 R4 R5 R6 R7 R8 R9 R10 R11 R12 R13 R14 R15 R16 R17 R18 R19 R20 R21 R22 R23 R24 R25 R26 R27 R28 R29 R30 R31 R32 R33 R34 R35 R36 R37 R38 R39 R40 R41 R42 R43 R46 R47 R48 R49 R50 R51 R52 R53 R55 R56 R57 R58 R59 R60 R61 R62 R63 R64 R65 R66 R87 R88 R89 R90 R91 R92 R93 R94: library part RC0603JR-070RL, "YAGEO 0603 0 ohm", Manufacturer_Name=KEMET, Mouser Part Number=603-RC0603JR-070RL, Datasheet Link=https://datasheet.datasheetarchive.com/originals/distributors/Datasheets_SAMA/902f9e387b938f871d31120f5fc1d65e.pdf, Geometry.Height=0.55mm, Manufacturer_Part_Number=RC0603JR-070RL, Mouser Price/Stock=https://www.mouser.co.uk/ProductDetail/YAGEO/RC0603JR-070RL?qs=2cAdsCoAWRGWyPcuXgGiXQ%3D%3D
R44 R45: library part RC0603JR-07270RL, "YAGEO 0603 270 ohm", Manufacturer_Name=KEMET, Manufacturer_Part_Number=RC0603JR-070RL, Mouser Part Number=603-RC0603JR-070RL, Datasheet Link=https://datasheet.datasheetarchive.com/originals/distributors/Datasheets_SAMA/902f9e387b938f871d31120f5fc1d65e.pdf, Geometry.Height=0.55mm, Mouser Price/Stock=https://www.mouser.co.uk/ProductDetail/YAGEO/RC0603JR-070RL?qs=2cAdsCoAWRGWyPcuXgGiXQ%3D%3D
R54: library part RC0603FR-104K7L, "YAGEO 0603 4.7k", Manufacturer_Name=KEMET, Manufacturer_Part_Number=RC0603JR-070RL, Mouser Part Number=603-RC0603JR-070RL, Datasheet Link=https://datasheet.datasheetarchive.com/originals/distributors/Datasheets_SAMA/902f9e387b938f871d31120f5fc1d65e.pdf, Geometry.Height=0.55mm, Mouser Price/Stock=https://www.mouser.co.uk/ProductDetail/YAGEO/RC0603JR-070RL?qs=2cAdsCoAWRGWyPcuXgGiXQ%3D%3D
R67: library part RC0603JR-0710KL, "YAGEO 0603 10k ohm", Manufacturer_Name=KEMET, Manufacturer_Part_Number=RC0603JR-070RL, Mouser Part Number=603-RC0603JR-070RL, Datasheet Link=https://datasheet.datasheetarchive.com/originals/distributors/Datasheets_SAMA/902f9e387b938f871d31120f5fc1d65e.pdf, Geometry.Height=0.55mm, Mouser Price/Stock=https://www.mouser.co.uk/ProductDetail/YAGEO/RC0603JR-070RL?qs=2cAdsCoAWRGWyPcuXgGiXQ%3D%3D
R68 R70 R71 R72 R73 R74 R75 R76 R77 R79 R80 R81 R82 R83 R84 R85 R86: library part RC0603FR-13180RL, "YAGEO 0603 180 ohm", Manufacturer_Name=KEMET, Manufacturer_Part_Number=RC0603JR-070RL, Mouser Part Number=603-RC0603JR-070RL, Datasheet Link=https://datasheet.datasheetarchive.com/originals/distributors/Datasheets_SAMA/902f9e387b938f871d31120f5fc1d65e.pdf, Geometry.Height=0.55mm, Mouser Price/Stock=https://www.mouser.co.uk/ProductDetail/YAGEO/RC0603JR-070RL?qs=2cAdsCoAWRGWyPcuXgGiXQ%3D%3D
R69: library part RC0603FR-10100RL, "YAGEO 0603 100 ohm", Manufacturer_Name=KEMET, Manufacturer_Part_Number=RC0603JR-070RL, Mouser Part Number=603-RC0603JR-070RL, Datasheet Link=https://datasheet.datasheetarchive.com/originals/distributors/Datasheets_SAMA/902f9e387b938f871d31120f5fc1d65e.pdf, Geometry.Height=0.55mm, Mouser Price/Stock=https://www.mouser.co.uk/ProductDetail/YAGEO/RC0603JR-070RL?qs=2cAdsCoAWRGWyPcuXgGiXQ%3D%3D
R78: library part RC0603FR-0747KL, "YAGEO 0603 47", Manufacturer_Name=KEMET, Manufacturer_Part_Number=RC0603JR-070RL, Mouser Part Number=603-RC0603JR-070RL, Datasheet Link=https://datasheet.datasheetarchive.com/originals/distributors/Datasheets_SAMA/902f9e387b938f871d31120f5fc1d65e.pdf, Geometry.Height=0.55mm, Mouser Price/Stock=https://www.mouser.co.uk/ProductDetail/YAGEO/RC0603JR-070RL?qs=2cAdsCoAWRGWyPcuXgGiXQ%3D%3D
TP1 TP2 TP3 TP4 TP5 TP6 TP7 TP8 TP9 TP10 TP11 TP12 TP13 TP14 TP15 TP16 TP17 TP18 TP19 TP20 TP21 TP22 TP23 TP24 TP25 TP26 TP27 TP28 TP29 TP30 TP31 TP32 TP33 TP34 TP35 TP36 TP37 TP38: Color=Black, Manufacturer=Samtec, Manufacturer Part Number=TST-105-01-G-D, Max Operating Temperature=125°C, Min Operating Temperature=-55°C, Category="Headers and Wire Housings", ComponentLink1Description=https://datasheet.ciiva.com/739/tst-mkt-739845.pdf?src-supplier=Digi-Key, ComponentLink1URL=https://datasheet.ciiva.com/739/tst-mkt-739845.pdf?src-supplier=Digi-Key, ComponentLink2Description=https://datasheet.ciiva.com/10018/htst-10018510.pdf?src-supplier=Avnet, ComponentLink2URL=https://datasheet.ciiva.com/10018/htst-10018510.pdf?src-supplier=Avnet, Connector Type="Male Pin", Contact Material=Bronze, Contact Mating Length=0.25inch, Contact Plating=Gold, Depth=9.27mm, Gender=Male, Housing Color=Black, Housing Material=Polyester, Length=27.94mm, Mount="Through Hole", Number of Contacts=16, Number of Positions=16, Number of Rows=2, Orientation=Straight, Packaging=Rail/Tube, Pitch=2.54mm, Pricing 1="1=2.85000, 10=2.73600, 100=2.28000, 500=1.93800, 1000=1.65300, 5000=1.48200 (USD)", REACH SVHC="No SVHC", RoHS=Yes, Row Spacing=0.1inch, Stock 1=227, Supplier 1=Digi-Key, Termination=Solder
U1: "USB-Serial SMD", Manufacturer_Name="FTDI Chip", Datasheet Link=http://www.ftdichip.com/Support/Documents/DataSheets/ICs/DS_FT232R.pdf, Height=2mm, Manufacturer_Part_Number=FT232RL-REEL
U2: "Octal Buffers/Drivers With 3-State Outputs", Manufacturer_Name="Texas Instruments", Mouser Part Number=595-SN74ABT240ADBR, Datasheet Link=http://www.ti.com/lit/gpn/sn74abt240a, Geometry.Height=2mm, Manufacturer_Part_Number=SN74ABT240ADBR, Mouser Price/Stock=https://www.mouser.co.uk/ProductDetail/Texas-Instruments/SN74ABT240ADBR?qs=JHHQeKcAU3Dt82k%252BVyiYdw%3D%3D
U3: "Hex Inverters", Manufacturer_Name="Texas Instruments", Mouser Part Number=595-SN74AC04PWR, Datasheet Link=http://www.ti.com/lit/gpn/sn74ac04, Geometry.Height=1.2mm, Manufacturer_Part_Number=SN74AC04PWR, Mouser Price/Stock=https://www.mouser.co.uk/ProductDetail/Texas-Instruments/SN74AC04PWR?qs=RZS%252BpEsUn7pRvPNqsga4SA%3D%3D

## Free pads (board coordinates)
  round 200 hole 170: 37(200,200) 37(200,3800) 37(5400,200) 37(5400,3800)

## Via types
v1: diameter 50, hole 28, Top Layer to Bottom Layer, 530 vias

## Nets (pads, with @x,y where several pads share a name; then routed paths per layer and width w, separated by ;. In a path a pad name is that pad's centre, name@x,y a point inside that pad or via, vN(x,y) a via of type N, cw(c..) or ccw(c..) an arc to the next point about the centre after c; other vN are vias at no path point)
+3.3: H2.3 R78.1 TP4.1 | length 4257.7
  Top Layer w10: H2.3@200,1800 H2.3@206.82,1793.18
  Bottom Layer w10: H2.3@200,1800 160,1800 110,1850 110,1950 TP4.1@510,2350 510,2400 710,2600 710,3130 750,3170 2540,3170 2660,3290 3090,3290 3168.5,3368.5 R78.1@3220,3368.5
+5: C1.1 C2.1 C3.1 C4.1 C5.1 C6.1 H1.2 H2.1 IC1.10 IC1.18 IC1.28 J1.1 R44.2 R45.2 R54.2 R68.2 R69.1 R70.2 R71.2 R72.2 R73.2 R74.2 R75.2 R76.2 R77.2 R79.2 R80.2 R81.2 R82.2 R83.2 R84.2 R85.2 R86.2 TP31.1 TP33.1 TP35.1 TP37.1 U1.4 U1.20 U2.20 U3.14 | length 5026.8
  Top Layer w10: U2.20@1289.76,2615.16 1335.73,2615.16 1376.58,2656 v1(1415.91,2656) ; IC1.10@2116.26,1473.15 2116.26,1555.4 2122.12,1561.26 v1@2264,1561.26 ; IC1.28@2210.75,1806.85 2210.75,1762.75 2200,1752 2200,1600 2230,1570 v1@2272.74,1570 ; v1(2280,1570) v1@2272.74,1570 ; IC1.18@2361.85,1561.26 v1@2264,1561.26 ; U3.14@2615.67,2526.77 2654.77,2526.77 2668,2540 2668,2668 v1(2700,2700) ; v1(4270.59,3354) 4308.62,3354 4314.12,3348.5 R44.2@4360,3348.5 ; v1(4560.59,3354) 4598.62,3354 4604.12,3348.5 R45.2@4650,3348.5 ; U1.4@4612.2,2889.57 4661,2889.57 4676.33,2904.89 4676.33,2960 4698.33,2982 v1(4718,2982) ; v1(4758,2563) 4758,2668 4808.06,2718.06 4808.06,2757.06 4812.61,2761.61 U1.20@4887.8,2761.61 ; R54.2@5081.5,3300 5150,3300 ; v1(5150,3220) 5150,3300 ; J1.1@5271.57,3300.39 5271.18,3300 5150,3300 ; v1@2264,1561.26 v1@2272.74,1570
  Bottom Layer w10: v1(1080,3240) 1080,3365.5 R83.2@1077.5,3368 ; R79.2@1475,3368.5 1401,3368.5 1400.5,3368 1375,3368 R80.2@1375,3368.5 R81.2@1275,3368.5 1201,3368.5 1200.5,3368 1175,3368 R82.2@1175,3368.5 1079.5,3368.5 1079,3368 R83.2@1077.5,3368 ; v1(1620,3240) 1620,3368.5 R68.2@1630,3368.5 1630,3368 1702.5,3368 1703,3368.5 R69.1@1775,3368.5 1775,3368 1810.5,3368 1811,3368.5 R70.2@1915,3368.5 1915,3368 1949.5,3368 1950,3368.5 R75.2@2050,3368.5 2050,3369 2200,3369 R76.2@2200,3368.5 ; v1(1938,1464) 1998,1464 2030,1496 C5.1@2030,1558.5 C6.1@2090,1558.5 2090,1559 2126.5,1559 2127,1558.5 C4.1@2150,1558.5 ; C3.1@2090,1741.5 C2.1@2150,1741.5 2188.5,1780 2300,1780 2340,1740 2340,1637.65 v1@2276.17,1573.83 ; C1.1@2210,1558.5 2216.34,1564.84 2271.21,1564.84 v1@2277.87,1571.5 ; v1(2498,3284) 2456,3326 2440,3326 2415,3351 R73.2@2415,3368.5 R74.2@2580,3368.5 ; R71.2@2810,3368.5 2897.68,3368.5 2909.18,3380 2930.82,3380 2942.32,3368.5 R72.2@3015,3368.5 ; v1(3340.59,3432) 3340.59,3396.79 3368.87,3368.5 R77.2@3430,3368.5 ; 801,3368.5 R86.2@775,3368.5 775,3368 800.5,3368 801,3368.5 ; 801,3368.5 R85.2@875,3368.5 ; R85.2@875,3368.5 901,3368.5 ; R85.2@875,3368.5 875,3368 900.5,3368 901,3368.5 ; 901,3368.5 R84.2@975,3368.5 R83.2@1075,3368.5 ; R83.2@1075,3368.5 1077,3368.5 R83.2@1077.5,3368 ; R83.2@1075,3368.5 1075,3368 R83.2@1077.5,3368
  other v1: 600,900 2920,3380
CPU_CS: R12.2 R41.2 R92.1 | length 3954.3
  Top Layer w10: R12.2@931.5,1450 931.5,1410 900,1378.5 900,1316 1117,1316 1190,1389 1190,1968.29 1549,2327.29 ; R92.1@1915,2718.5 1915,2693.29 1549,2327.29 ; R41.2@2200,1218.5 2200,1189 2160,1149 1580,1149 1549,1180 1549,2327.29
CPU_D0: R4.1 R17.1 U2.2 | length 2682
  Top Layer w10: R4.1@631.5,1900 631.5,1988.5 v1(600,2020) 600,2478 711.57,2589.57 U2.2@1010.24,2589.57 ; v1(1934,1949) 2005,2020 2140,2020 2150,2030 R17.1@2150,2051.5
  Bottom Layer w10: v1(600,2020) 671,1949 v1(1934,1949)
CPU_D1: R6.1 R19.1 U2.4 | length 2702.6
  Top Layer w10: R6.1@631.5,1800 642.24,1810.75 642.24,1822.24 670,1850 670,2066 650,2086 650,2310 ; v1(720,2290) 719.72,2290 695.72,2314 654,2314 650,2310 ; U2.4@1010.24,2538.39 708.39,2538.39 650,2480 650,2314 650,2310 ; R19.1@2090,2051.5 v1(2090,2160)
  Bottom Layer w10: v1(720,2290) 847,2163 2087,2163 v1(2090,2160)
CPU_D2: R7.1 R21.1 U2.6 | length 3368.5
  Top Layer w10: R7.1@631.5,1700 949.53,1700 954.53,1705 954.53,1789.47 750,1994 750,2156.21 769.65,2175.86 769.65,2340 755.26,2354.39 686.61,2354.39 670,2371 670,2440 717.2,2487.2 U2.6@1010.24,2487.2 ; R21.1@2030,2051.5 2030,2200 2076,2246 v1(2130,2246)
  Bottom Layer w10: v1(750,2150) 760.82,2150 772.82,2138 1368,2138 1386,2120 2110,2120 2130,2140 v1(2130,2246)
CPU_D3: R9.1 R23.1 U2.8 | length 3117.5
  Top Layer w10: R9.1@631.5,1600 943,1600 994.53,1651.53 994.53,1909.91 860,2044.44 860,2376.02 920,2436.02 ; v1(800,2420) 809.83,2420 825.86,2436.02 920,2436.02 ; U2.8@1010.24,2436.02 920,2436.02 ; v1(1700,2000) 1723.5,1976.5 R23.1@1723.5,1860
  Bottom Layer w10: v1(800,2420) 720,2420 680,2380 680,2060 740,2000 v1(1700,2000)
CPU_D4: R11.1 R25.1 U2.11 | length 2163.9
  Top Layer w10: R11.1@631.5,1500 880.75,1500 884.45,1503.7 1035.7,1503.7 1056,1524 v1(1056,1780) 1056,2315 1125.84,2384.84 U2.11@1289.76,2384.84 ; v1(1674,1780) 1694,1800 R25.1@1723.5,1800
  Bottom Layer w10: v1(1056,1780) v1(1674,1780)
CPU_D5: R13.1 R27.1 U2.13 | length 3972.4
  Top Layer w10: R13.1@631.5,1400 631.5,1416 900,1416 900,1483.7 1098.7,1483.7 1110.88,1495.88 1110.88,2135.88 1379.65,2404.65 ; U2.13@1289.76,2436.02 1339,2436.02 ; 1340,2436.02 1371.37,2404.65 1379.65,2404.65 ; R27.1@1723.5,1740 1723.5,1758 1747,1758 1755,1766 1755,1971 2144,2360 2190,2360 2210,2380 2210,2565 2025,2750 1594,2750 1570,2726 1570,2444.26 1530.39,2404.65 1379.65,2404.65
CPU_D6: R15.1 R29.1 U2.15 | length 3572.2
  Top Layer w10: R15.1@631.5,1300 631.5,1260 661.6,1229.9 v1(1180.9,1229.9) ; U2.15@1289.76,2487.2 1329.8,2487.2 1386,2431 1481,2431 v1(1520,2470) ; v1(1669,1680) R29.1@1723.5,1680
  Bottom Layer w10: v1(1180.9,1229.9) 1184.68,1233.68 1213.68,1233.68 1660,1680 v1(1669,1680) 1757,1680 2117,2040 2363,2040 2383,2060 2383,2136 2223.79,2295.21 1655.79,2295.21 1520,2431 v1(1520,2470)
CPU_D7: R16.1 R31.1 U2.17 | length 2869.2
  Top Layer w10: R16.1@631.5,1200 639.83,1191.67 639.83,1172.67 672.5,1140 v1(740,1140) ; U2.17@1289.76,2538.39 1351.61,2538.39 v1(1400,2490) ; v1(1647,2255) v1(1647,1847) 1610,1810 1610,1680 1670,1620 R31.1@1723.5,1620
  Bottom Layer w10: v1(740,1140) 740,1429 1001,1690 1001,1795 1053,1847 v1(1647,1847) ; v1(1400,2490) 1402.1,2487.9 1402.1,2332.9 1480,2255 v1(1647,2255)
CPU_nInt: R8.2 R43.2 R88.1 | length 4402.8
  Top Layer w10: v1(810,2350) 810,2009 974.53,1844.47 974.53,1685.53 939,1650 R8.2@931.5,1650 ; v1(1630,2628) v1(1630,2674) R88.1@1630,2718.5 ; v1(1897,1420) 1897,1231.17 1941.17,1187 2070,1187 2080,1197 R43.2@2080,1218.5
  Bottom Layer w10: v1(810,2350) 1156,2696 1436,2696 1458,2674 v1(1630,2674) ; v1(1630,2628) 1917,2341 2325,2341 2403,2263 2403,1984 2305,1886 2037,1886 1897,1746 v1(1897,1420)
CPU_Reset: R14.2 R20.2 R90.1 | length 3133.9
  Top Layer w10: R14.2@931.5,1350 1080,1350 1130.88,1400.88 1130.88,1960.23 1164,1993.34 ; v1(1164,2096) 1164,1993.34 ; R90.1@1775,2718.5 1775,2604.34 1164,1993.34 ; v1(2343,2096) 2350,2089 R20.2@2350,2051.5
  Bottom Layer w10: v1(1164,2096) v1(2343,2096)
CPU_RnW: R10.2 R42.2 R94.1 | length 4677.6
  Top Layer w10: R10.2@931.5,1550 972,1550 1015,1593 1015,2264.18 1000,2279.18 v1(1000,2290) ; R42.2@2140,1218.5 2140,1240 2150,1250 2416,1250 2426,1260 v1(2426,1367) ; v1(2343,2260) v1(2710,2260) 2777,2260 2884.14,2260 2890,2265.86 2890,2444.14 2884.14,2450 R94.1@2811.5,2450
  Bottom Layer w10: v1(1000,2290) 1002.14,2292.14 1002.14,2324.14 1278,2600 1537,2600 1817,2320 2283,2320 v1(2343,2260) ; v1(2426,1367) 2426,1976 v1(2710,2260)
CPU_RnW_Inverted: LED10.1 U3.10 U3.13 | length 1957.3
  Top Layer w10: v1(2050,2980) LED10.1@2050,3343.5 ; v1(2540,2710) 2540,2444.41 2560,2424.41 U3.10@2615.67,2424.41 ; U3.13@2615.67,2501.18 2701.18,2501.18 v1(2725,2525)
  Bottom Layer w10: v1(2050,2980) 2505,2525 v1(2725,2525) v1(2540,2710)
GND: C1.2 C2.2 C3.2 C4.2 C5.2 C6.2 H1.6 H2.13 H2.15 IC1.19 IC1.29 J1.4 J1.5 J1.6 J1.7 J1.8 J1.9 LED20.1 LED21.1 R67.1 TP32.1 TP34.1 TP36.1 TP38.1 U1.7 U1.18 U1.21 U1.25 U1.26 U2.1 U2.10 U2.19 U3.7 | length 4711
  Top Layer w10: v1(870,2680) 934.84,2615.16 U2.1@1010.24,2615.16 ; v1(910,2310) 917.65,2317.65 917.65,2333.56 966.83,2382.74 1008.14,2382.74 U2.10@1010.24,2384.84 ; U2.19@1289.76,2589.57 1360,2589.57 1409.57,2540 v1(1470,2540) ; IC1.29@2179.25,1806.85 2179.25,1959.25 2240,2020 2475,2020 v1(2557,1938) ; v1(2250,1710) 2253.28,1706.72 2253.28,1676.72 2330.43,1599.57 2355.04,1599.57 IC1.19@2361.85,1592.76 ; U3.7@2384.33,2373.23 2470.85,2373.23 v1(2484.08,2360) ; v1(3330,3200) 3220,3310 LED21.1@3220,3343.5 3326.5,3240 LED20.1@3430,3343.5 ; U1.7@4612.2,2812.8 4662.8,2812.8 v1(4700,2850) ; v1(4809,3121) 4798,3121 4798,3102 4838,3062 4838,2900 4848.43,2889.57 U1.25@4887.8,2889.57 U1.26@4887.8,2915.16 ; U1.18@4887.8,2710.43 4839,2710.43 4828.06,2699.49 4828.06,2522.76 4840,2510.82 v1(4840,2500) 4834.14,2500 4814.14,2480 4705.86,2480 4700,2485.86 4700,2640 4780,2720 4780,2780 4787.2,2787.2 U1.21@4887.8,2787.2 ; R67.1@5091.5,2820 5229.18,2820 5239.18,2810 v1(5250,2810) ; J1.9@5271.57,3188.19 v1(5350.79,3188.19) ; J1.5@5271.57,3426.38 J1.4@5271.57,3394.88 5434.88,3394.88 5500,3460 5500,3526.69 J1.7@5488.11,3538.58 5488.11,3580.47 5470,3598.58 v1@5418.27,3598.58 ; J1.6@5271.57,3538.58 5276.67,3543.67 5276.67,3587.09 5288.15,3598.58 v1(5408.9,3598.58) v1@5418.27,3598.58 ; v1(5455,3064) 5455,3092.89 5488.11,3126 J1.8@5488.11,3188.19 ; 5488.11,3581.89 5471.42,3598.58 v1@5418.27,3598.58
  Bottom Layer w10: C5.2@2030,1621.5 C6.2@2090,1621.5 ; C2.2@2150,1678.5 2150,1679 2090,1679 C3.2@2090,1678.5 C6.2@2090,1621.5 ; C1.2@2210,1621.5 2210,1648 ; v1(2250,1710) 2242.72,1702.72 2242.72,1680.72 2210,1648 ; C6.2@2090,1621.5 C4.2@2150,1621.5 2183.5,1621.5 2210,1648
NetH1_1: H1.1 R1.2 | length 193.5
  Top Layer w10: R1.2@3821.5,2190 H1.1@4015,2190
NetH1_3: H1.3 R2.2 | length 210.1
  Top Layer w10: R2.2@3821.5,2130 3975,2130 H1.3@4015,2090
NetH1_4: H1.4 R3.1 | length 326.6
  Top Layer w10: R3.1@3821.5,2070 3900,2070 3930,2040 4065,2040 H1.4@4115,2090
NetH1_5: H1.5 R5.2 | length 201.8
  Top Layer w10: R5.2@3821.5,2010 3920,2010 3940,1990 H1.5@4015,1990
NetH2_2: H2.2 R4.2 | length 268.5
  Top Layer w10: H2.2@300,1900 R4.2@568.5,1900
NetH2_4: H2.4 R6.2 | length 268.5
  Top Layer w10: H2.4@300,1800 R6.2@568.5,1800
NetH2_5: H2.5 R8.1 | length 689.2
  Top Layer w10: H2.5@200,1700 250,1650 R8.1@868.5,1650
NetH2_6: H2.6 R7.2 | length 268.5
  Top Layer w10: H2.6@300,1700 R7.2@568.5,1700
NetH2_7: H2.7 R10.1 | length 689.2
  Top Layer w10: H2.7@200,1600 250,1550 R10.1@868.5,1550
NetH2_8: H2.8 R9.2 | length 268.5
  Top Layer w10: H2.8@300,1600 R9.2@568.5,1600
NetH2_9: H2.9 R12.1 | length 689.2
  Top Layer w10: H2.9@200,1500 250,1450 R12.1@868.5,1450
NetH2_10: H2.10 R11.2 | length 268.5
  Top Layer w10: H2.10@300,1500 R11.2@568.5,1500
NetH2_11: H2.11 R14.1 | length 689.2
  Top Layer w10: H2.11@200,1400 250,1350 R14.1@868.5,1350
NetH2_12: H2.12 R13.2 | length 268.5
  Top Layer w10: H2.12@300,1400 R13.2@568.5,1400
NetH2_14: H2.14 R15.2 | length 268.5
  Top Layer w10: H2.14@300,1300 R15.2@568.5,1300
NetH2_16: H2.16 R16.2 | length 268.5
  Top Layer w10: H2.16@300,1200 R16.2@568.5,1200
NetIC1_1: IC1.1 R23.2 | length 287.1
  Top Layer w10: R23.2@1786.5,1860 1850,1860 1959.76,1750.24 IC1.1@2028.15,1750.24
NetIC1_2: IC1.2 R25.2 | length 275.3
  Top Layer w10: R25.2@1786.5,1800 1860,1800 1941.26,1718.74 IC1.2@2028.15,1718.74
NetIC1_3: IC1.3 R27.2 | length 263.5
  Top Layer w10: R27.2@1786.5,1740 1870,1740 1922.76,1687.24 IC1.3@2028.15,1687.24
NetIC1_4: IC1.4 R29.2 | length 251.7
  Top Layer w10: R29.2@1786.5,1680 1880,1680 1904.25,1655.75 IC1.4@2028.15,1655.75
NetIC1_5: IC1.5 R31.2 | length 243.4
  Top Layer w10: R31.2@1786.5,1620 2023.9,1620 IC1.5@2028.15,1624.25
NetIC1_6: IC1.6 R34.2 | length 255.2
  Top Layer w10: R34.2@1786.5,1560 1870,1560 1902.76,1592.76 IC1.6@2028.15,1592.76
NetIC1_7: IC1.7 R36.2 | length 267
  Top Layer w10: R36.2@1786.5,1500 1860,1500 1921.26,1561.26 IC1.7@2028.15,1561.26
NetIC1_8: IC1.8 R38.2 | length 278.8
  Top Layer w10: R38.2@1786.5,1440 1850,1440 1939.76,1529.76 IC1.8@2028.15,1529.76